# Allegro board belt-box-002-119pm14.brd
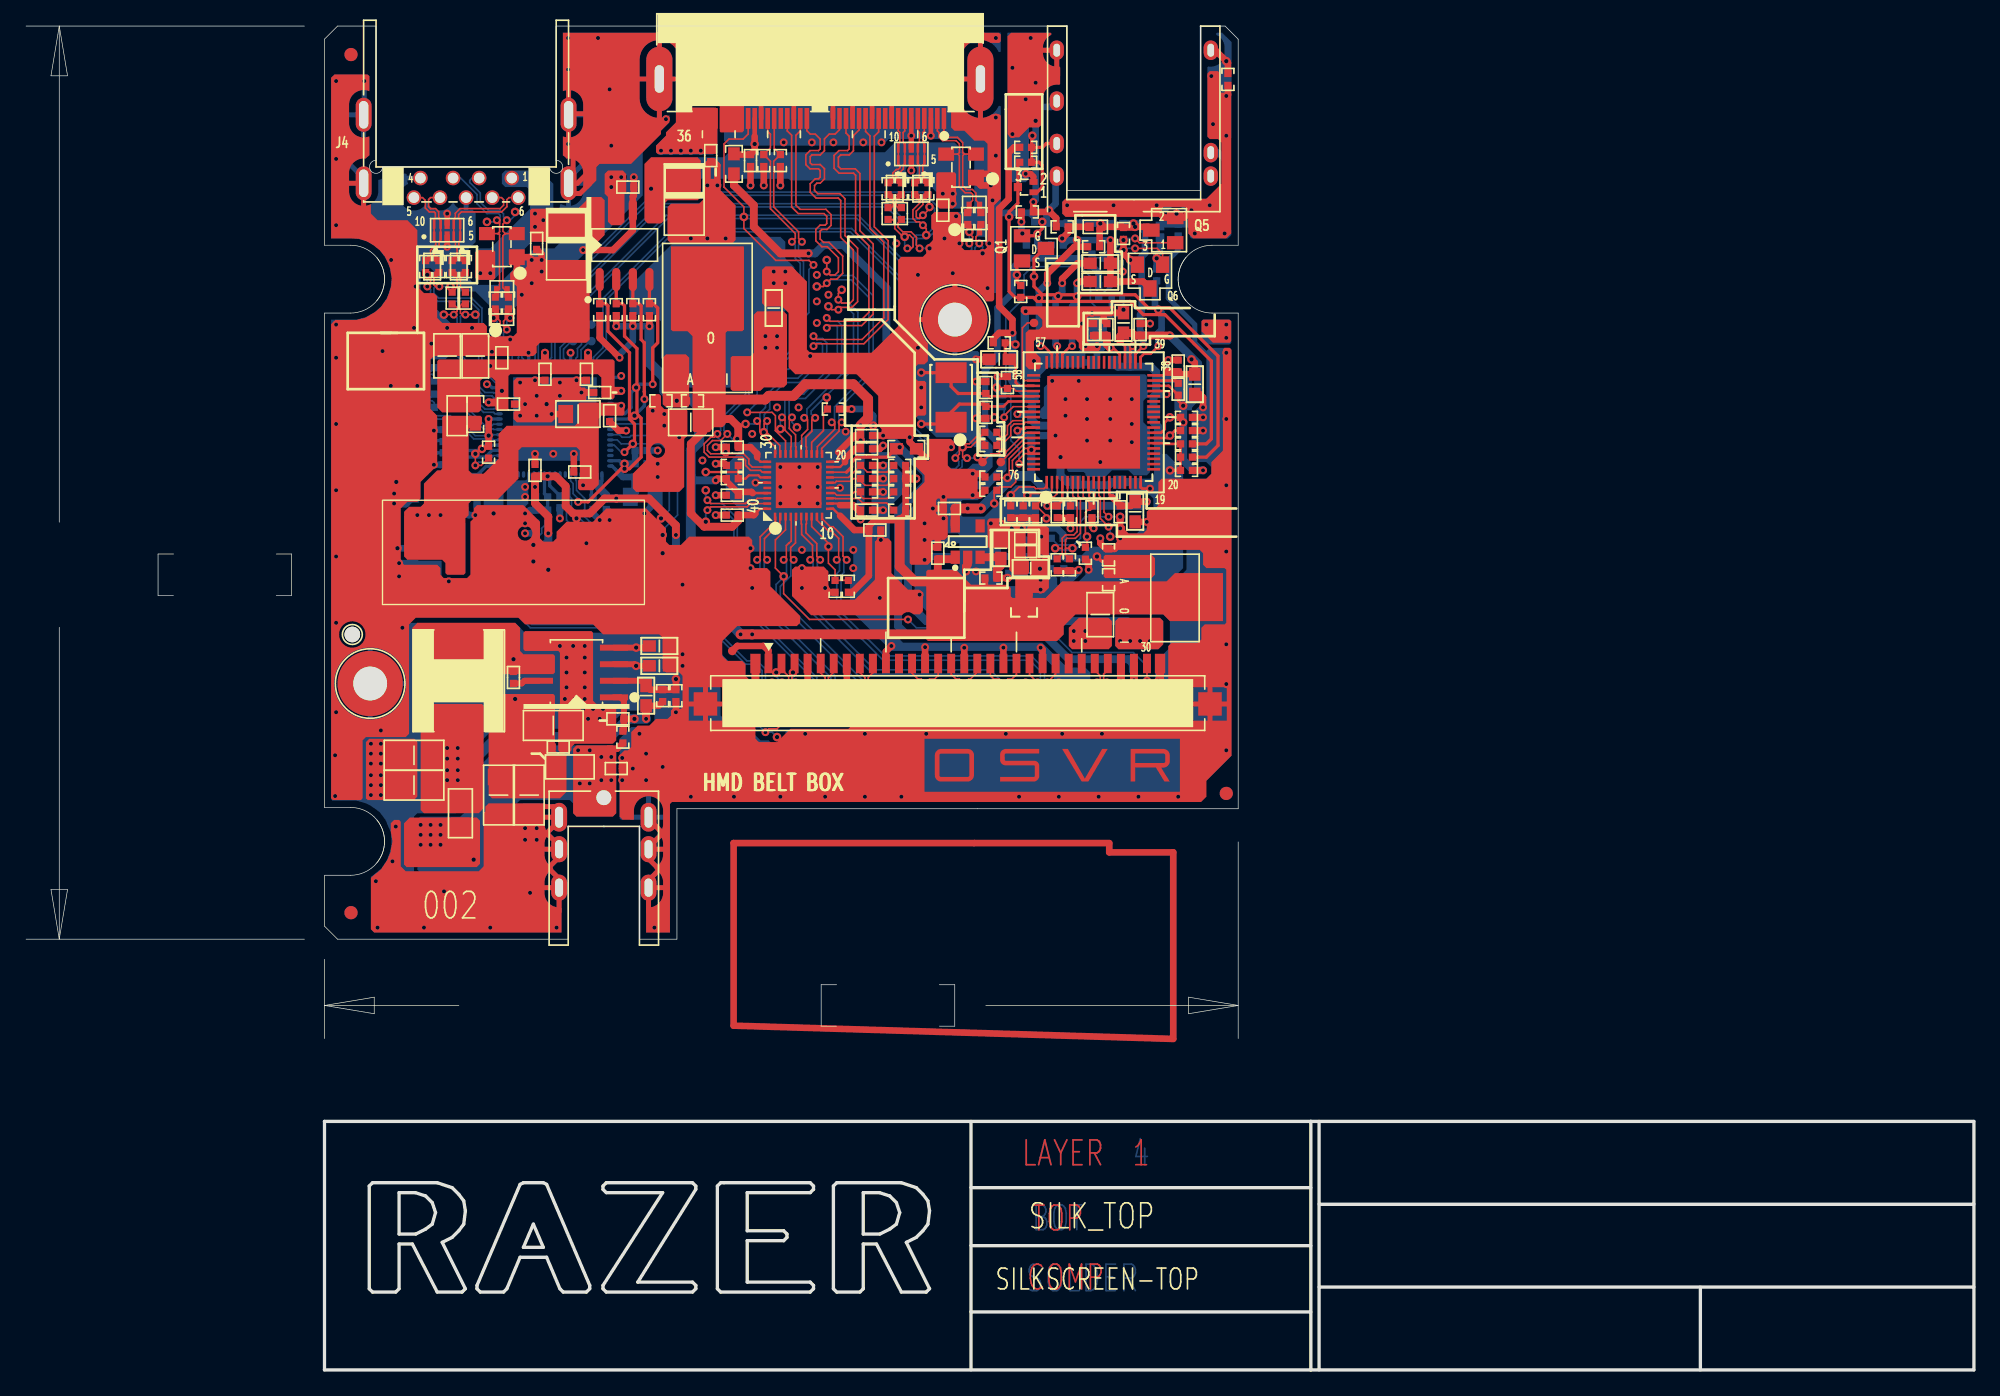
[diagram p0: board, top side]
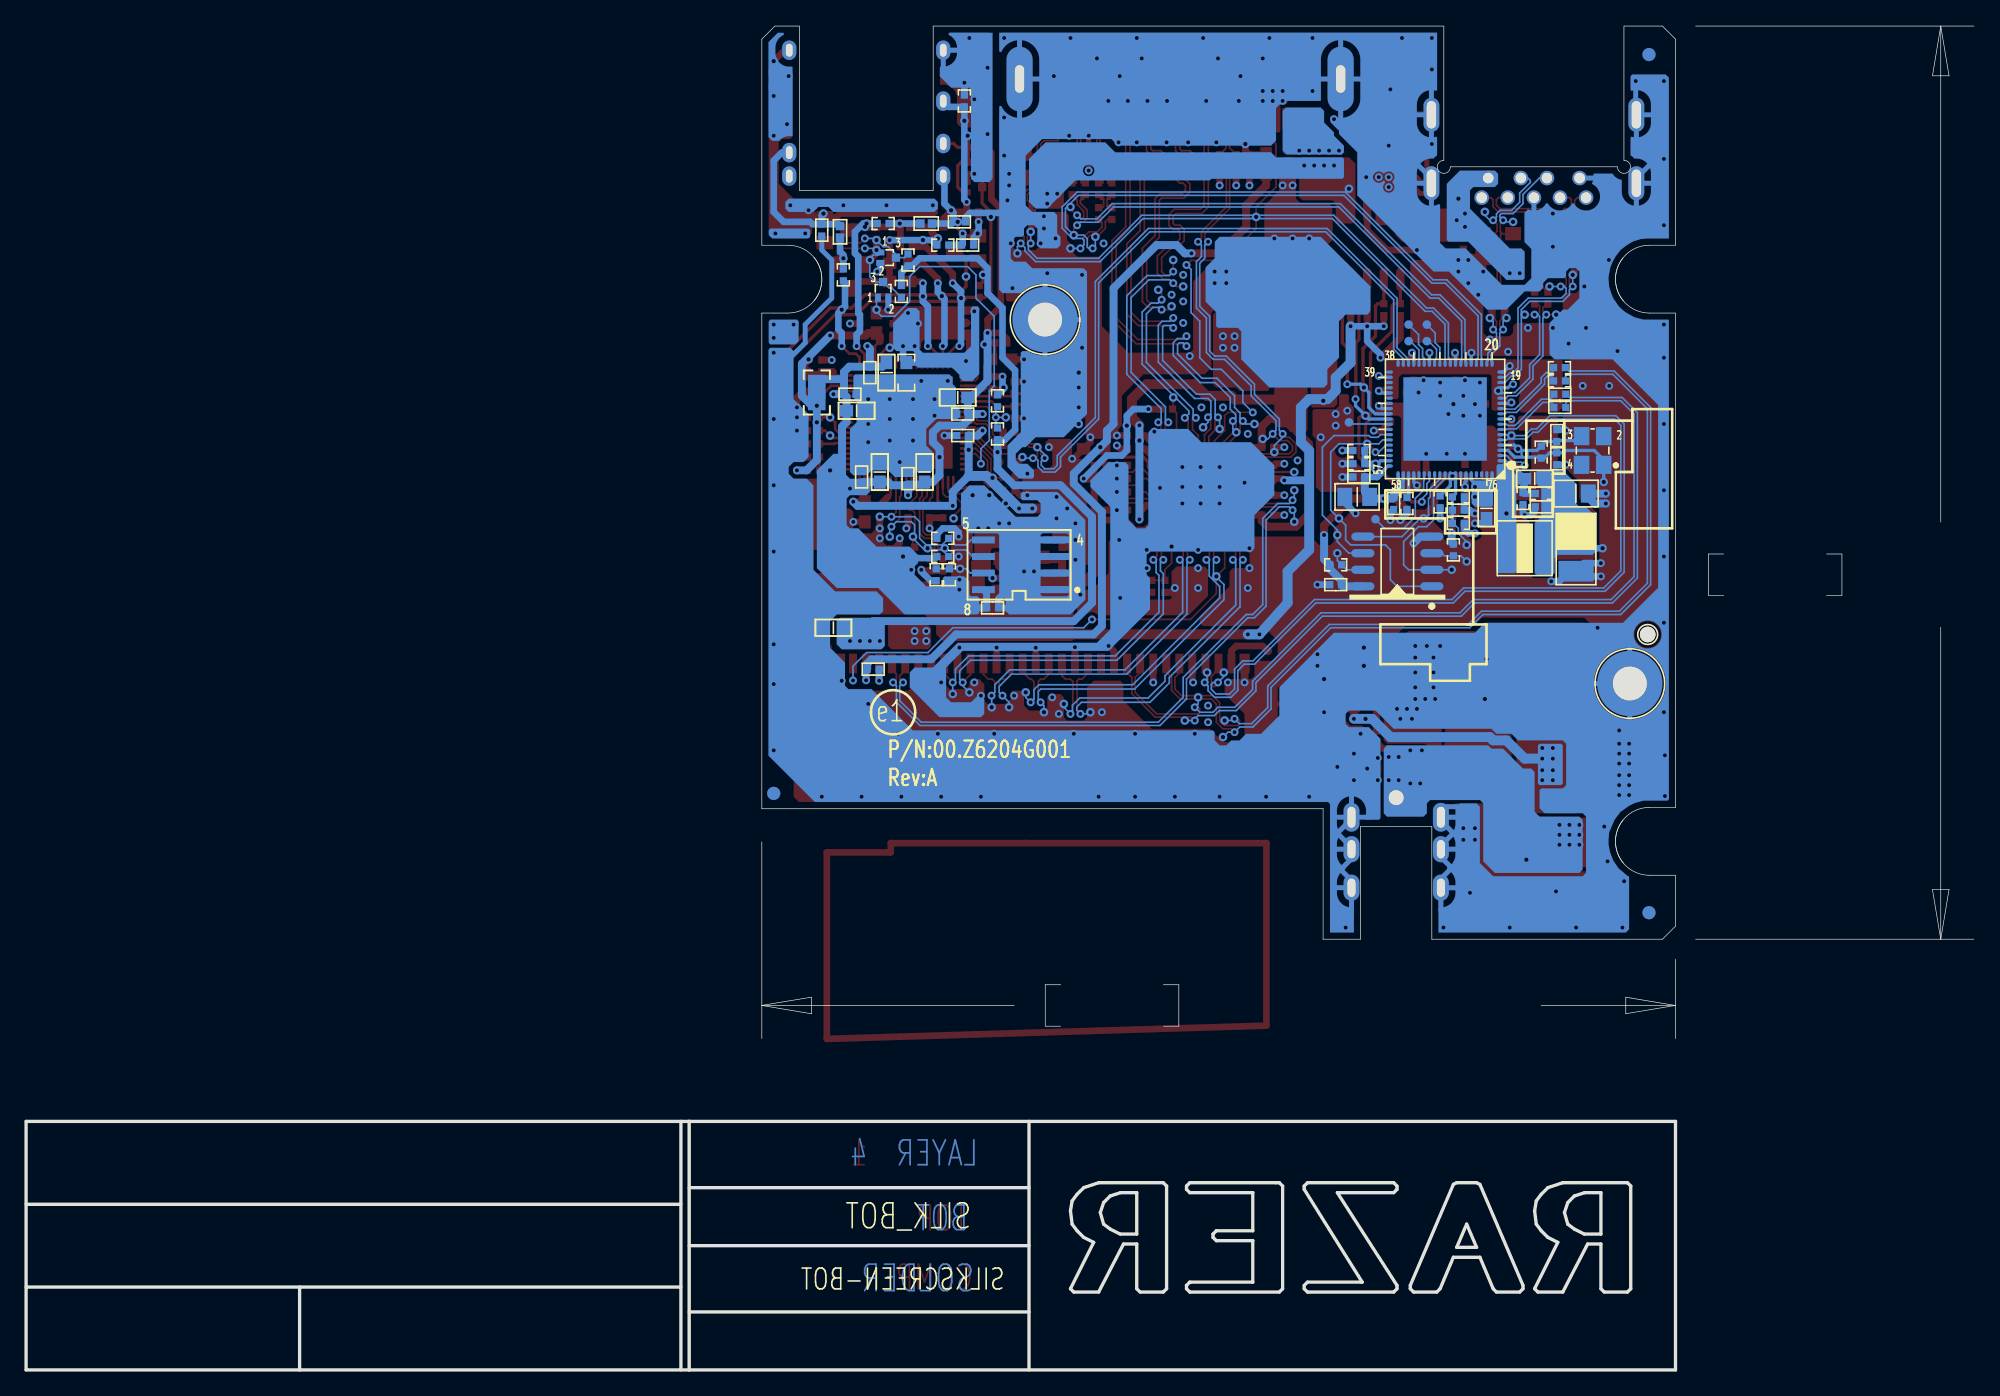
[diagram p1: board, bottom side, seen from below]

Outline 149.22 x 103.02 mm; copper layers: TOP, IN1, IN2, BOTTOM. Coordinates in mm from the lower left corner of the outline.
Outline path: 26.86,85.28 arc(27.46,83.62) 26.86,81.96 ; 26.86,42.18 arc(27.46,40.52) 26.86,38.86 ; 88.86,81.96 arc(88.26,83.62) 88.86,85.28 ; 22.86,102.02 22.86,86.22 24.86,86.22 arc(27.46,83.62) 24.86,81.02 22.86,81.02 22.86,43.12 24.86,43.12 arc(27.46,40.52) 24.86,37.92 22.86,37.92 22.86,34.02 23.86,33.02 41.53,33.02 41.53,41.67 46.99,41.67 46.99,33.02 49.86,33.02 49.86,43.02 92.86,43.02 92.86,81.02 90.86,81.02 arc(88.26,83.62) 90.86,86.22 92.86,86.22 92.86,102.02 91.86,103.02 89.99,103.02 89.99,90.42 79.73,90.42 79.73,103.02 40.61,103.02 40.61,92.73 arc(40.96,91.88) 40.11,92.23 27.31,92.23 arc(26.46,91.88) 26.81,92.73 26.81,103.02 23.86,103.02 22.86,102.02

## Design rules (mm)
net group DIFFPAIR0: nets HMD_CON_DATA2+ HMD_CON_DATA2-
net group DIFFPAIR1: nets HMD_CON_DATA1+ HMD_CON_DATA1-
net group DIFFPAIR2: nets HMD_CON_DATA0+ HMD_CON_DATA0-
net group DIFFPAIR3: nets HMD_CON_CLK+ HMD_CON_CLK-
net group DIFFPAIR4: nets HDMI_CON_CLK+ HDMI_CON_CLK-
net group DIFFPAIR5: nets HDMI_CON_DATA0+ HDMI_CON_DATA0-
net group DIFFPAIR6: nets HDMI_CON_DATA1+ HDMI_CON_DATA1-
net group DIFFPAIR7: nets HDMI_CON_DATA2+ HDMI_CON_DATA2-
net group DIFFPAIR13: nets HUB_RX1_CON_N HUB_RX1_CON_P
net group DIFFPAIR14: nets HUB_RXN1 HUB_RXP1
net group DIFFPAIR15: nets HUB_TX1_CON_N HUB_TX1_CON_P
net group DIFFPAIR16: nets USB3_TX1_C_N USB3_TX1_C_P
net group DIFFPAIR17: nets HUB_TXN1 HUB_TXP1
net group DIFFPAIR18: nets USB1+ USB1-
net group DIFFPAIR19: nets HUB_D+1 HUB_D-1
net group DIFFPAIR20: nets USB3.0_RXN_R USB3.0_RXP_R
net group DIFFPAIR21: nets USB3.0_TXN_R USB3.0_TXP_R
net group DIFFPAIR22: nets USB3.0_RXN USB3.0_RXP
net group DIFFPAIR23: nets USB3.0_TXN USB3.0_TXP
net group DIFFPAIR24: nets USB2.0_D+ USB2.0_D-
net group DIFFPAIR25: nets HUB_TX2_CON_N HUB_TX2_CON_P
net group DIFFPAIR26: nets USB3_TX2_C_N USB3_TX2_C_P
net group DIFFPAIR27: nets HUB_TXN2 HUB_TXP2
net group DIFFPAIR28: nets HUB_RX2_CON_N HUB_RX2_CON_P
net group DIFFPAIR29: nets HUB_RXN2 HUB_RXP2
net group DIFFPAIR30: nets USB2+ USB2-
net group DIFFPAIR31: nets HUB_D+2 HUB_D-2
net group DIFFPAIR32: nets USBP1N_R USBP1P_R
net group DIFFPAIR33: nets HUB_D+3 HUB_D-3

## Placement (name value [footprint] x y rotation side)
C1  0.1UF  [C0402]  54.1 65.53 0 top
C2  0.1U/16V_4  [C0402]  54.1 67.06 0 top
C3  0.1UF  [C0402]  54.1 70.74 0 top
C4  0.1UF  [C0402]  84.33 53.72 180 bottom
C5  0.1UF  [C0402]  55.5 92.71 270 top
C6  0.1UF  [C0402]  64.39 71.63 0 top
C7  0.1U/16V_4  [C0402]  65.02 64.39 0 top
C8  0.1UF  [C0402]  64.39 70.61 0 top
C9  0.1UF  [C0402]  64.39 65.91 0 top
C10  10uF_X5R_6.3V  [C0805]  82.3 57.91 90 top
C11  1uF_X5R_6.3V  [C0603]  87.38 56.9 180 bottom
C12  10uF_X5R_6.3V  [C0805]  50.93 72.64 0 top
C13  1uF_X5R_6.3V  [C0603]  57.28 81.41 270 top
C14  6TPE220MAZB  [TANB]  50.42 89.53 270 top
C15  470pF_X7R_50V  [C0402]  70.23 88.9 270 top
C16  0.1uF_X5R_10V  [C0402]  67.06 88.65 90 top
C17  0.1uF_X5R_10V  [C0402]  66.04 88.65 90 top
C18  0.1uF_X5R_10V  [C0402]  31.72 74.8 180 bottom
C19  0.1uF_X5R_10V  [C0402]  31.72 73.79 180 bottom
C20  0.1UF  [C0402]  42.42 68.83 180 top
C21  0.1UF  [C0402]  44.7 73.15 270 top
C22  0.1UF  [C0402]  43.94 74.93 180 top
C23  0.1UF  [C0402]  36.96 74.04 0 top
C24  0.1UF  [C0402]  42.93 76.33 270 top
C25  0.1UF  [C0402]  39.75 76.33 270 top
C26  0.1UF  [C0402]  36.45 77.6 90 top
C27  4.7UF  [C0603]  37.34 66.04 270 bottom
C28  10uF_X5R_6.3V  [C0805]  47.24 66.93 180 bottom
C29  0.1UF  [C0402]  38.99 68.96 90 top
C30  0.1UF  [C0402]  44.45 66.42 270 bottom
C31  0.1UF  [C0402]  47.12 68.45 0 bottom
C32  0.1UF  [C0402]  48.89 60.2 0 bottom
C33  22uF  [C0805]  30.49 67.18 0 bottom
C34  0.1UF  [C0402]  33.15 66.17 0 bottom
C35  22P_NPO_50V  [C0603]  33.64 68.33 0 bottom
C36  10uF_X5R_6.3V  [C0805]  42.29 73.28 0 top
C37  10uF_X5R_6.3V  [C0805]  34.42 77.72 270 top
C38  10uF_X5R_6.3V  [C0805]  32.26 77.72 270 top
C39  27P_NPO_50V  [C0402]  31.95 69.85 270 bottom
C40  1U/6.3V_4  [C0402]  39.5 65.91 180 bottom
C41  27P_NPO_50V  [C0402]  31.95 71.63 90 bottom
C42  1U/6.3V_4  [C0402]  46.1 90.68 0 top
C43  6TPE220MAZB  [TANB]  41.4 86.11 270 top
C44  470pF_X7R_50V  [C0402]  39.12 86.36 270 top
C45  0.1uF_X5R_10V  [C0402]  32.64 82.17 90 top
C46  0.1uF_X5R_10V  [C0402]  33.66 82.17 90 top
C47  15P/50V_4  [C0402]  73.53 75.31 90 top
C48  10U/6.3V_6  [C0603]  77.85 74.55 0 bottom
C49  0.1U/16V_4  [C0402]  77.47 73.28 0 bottom
C50  10U/6.3V_6  [C0603]  74.55 77.47 180 top
C51  18P/50V_4  [C0402]  73.53 73.41 270 top
C52  10U/6.3V_6  [C0603]  76.96 61.47 180 top
C53  1U/6.3V_4  [C0402]  76.58 63.75 180 top
C54  0.1U/16V/X7R_4  [C0402]  76.58 62.74 180 top
C55  10U/6.3V_6  [C0603]  80.39 68.83 90 bottom
C56  0.1U/16V_4  [C0402]  81.66 68.33 90 bottom
C57  10U/6.3V_6  [C0603]  84.96 65.79 270 top
C58  0.1U/16V_4  [C0402]  83.82 65.79 270 top
C59  0.1U/16V_4  [C0402]  77.47 71.63 0 bottom
C60  0.1U/16V_4  [C0402]  78.99 65.79 270 top
C61  1U/6.3V_4  [C0402]  81.79 79.76 270 top
C62  0.1U/16V_4  [C0402]  82.8 79.76 90 top
C63  10U/6.3V_6  [C0603]  84.07 80.26 90 top
C64  0.1U/16V_4  [C0402]  85.34 79.76 90 top
C65  0.1U/16V_4  [C0402]  85.22 68.45 90 bottom
C66  10U/6.3V_6  [C0603]  83.31 76.45 270 bottom
C67  0.1U/16V_4  [C0402]  84.58 76.45 270 bottom
C68  *10U/6.3V_6_NC  [C0603]  83.82 68.83 90 bottom
C69  1U/6.3V_4  [C0402]  69.85 62.61 270 top
C70  1U/6.3V_4  [C0402]  70.74 66.04 0 top
C71  10U/6.3V_6  [C0603]  89.53 75.56 270 top
C72  0.1U/16V_4  [C0402]  88.27 76.96 90 top
C73  1U/6.3V_4  [C0402]  88.27 75.18 90 top
C74  2.2U/6.3V_6  [C0603]  74.68 62.99 270 top
C75  10U/6.3V_6  [C0603]  85.6 73.53 180 bottom
C76  0.1U/16V_4  [C0402]  86.11 74.8 180 bottom
C77  2.2U/6.3V_6  [C0603]  82.3 83.44 180 top
C78  2.2U/6.3V_6  [C0603]  82.3 84.84 180 top
C79  0.1U/16V_4  [C0402]  75.18 58.42 180 bottom
C80  100pF_NPO_50V  [C0402]  77.72 88.01 180 bottom
C81  100pF_NPO_50V  [C0402]  88.27 87.38 270 bottom
C82  1uF/25V  [C0603]  48.51 53.98 0 top
C83  3300PF/25V  [C0603]  48.51 55.5 0 top
C84  10uf/25v  [C1206]  40.39 49.4 0 top
C85  0.1uf/16v_NC  [C0402]  45.34 49.91 180 top
C86  0.1uF/25V  [C0402]  37.34 53.09 90 top
C87  22UF/10V  [C1206]  29.72 47.12 180 top
C88  2200pF/50V_X7R  [C0402]  40.77 47.75 0 top
C89  10uf/25v  [C1206]  36.2 44.07 270 top
C90  22UF/10V  [C1206]  29.72 44.83 180 top
C91  22PF/50V  [C0603]  47.5 51.69 90 top
C92  2200pF/50V_X7R  [C0402]  45.21 46.1 0 top
C93  0.1UF  [C0402]  52.45 93.09 270 top
C94  X_0.1U/16V_4  [C0402]  81.66 65.79 90 top
C95  1U/6.3V_4  [C0402]  77.09 86.23 0 bottom
C96  10uf/25v  [C1206]  38.54 44.07 270 top
EC1  100uF  [TANBB2]  30.48 62.74 270 bottom
FB1  BK1608HS601  [L0402]  81.91 87.63 180 top
FB2  BK1608HS601  [L0402]  86.87 87.25 90 bottom
FB3  BK1608HS601  [L0402]  80.26 87.88 180 bottom
H1  -  [HOLEC197D102]  71.16 80.52 0 top
H2  -  [HOLEC197D102]  26.36 52.62 0 top
H4  -  [HOLEC47D47N]  24.99 56.38 0 top
J1  IPEX_30PIN  [I-PEX_20389-030E]  71.37 51.05 0 top
J2  Hirose 36pin  [HRS_EDC3-124422]  60.81 101.84 180 top
J3  SINGATRON_2DC-5061-Q05F  [SINGATRON_2DC3064-010111F]  44.26 35.57 180 top
J4  CON SUNFUN_U3FA-RS01  [SINGATRON_2UB1585-000121F]  33.71 96.22 180 top
J6  2SJ2284-102592  [SINGATRON_2SJ2284-102592]  84.86 103.02 180 top
L1  X_80_100MHz  [DLP11T]  68.58 90.55 270 top
L2  X_80_100MHz  [DLP11T]  66.55 90.55 270 top
L3  X_90_100MHz  [BW_WCM2012F2S-900T04]  72.64 88.27 90 top
L4  10uH  [TY-TOP_MDJE4040T100MM]  34.42 62.99 180 bottom
L5  X_80_100MHz  [DLP11T]  31.12 84.58 270 top
L6  X_80_100MHz  [DLP11T]  33.15 84.58 270 top
L7  X_90_100MHz  [BW_WCM2012F2S-900T04]  36.45 81.79 90 top
L8  *0_0805short_NC  [SHORT0805]  76.45 59.44 270 top
L9  *0_0805short_NC  [SHORT0805]  88.65 74.93 90 bottom
L10  3.3UH_SMPI0603HW  [SMPI0603HW]  33.15 52.83 270 top
L11  HCB2012K_800T80_0805  [L0805]  41.66 46.23 0 top
L12  X_HCB2012K_800T80_0805_NC  [L0805]  33.27 42.67 270 top
NOREF  -  []  71.12 46.36 0 top
NOREF#2  -  []  12.86 201.3 0 top
NOREF#3  -  [unnamed#2]  91.95 44.2 0 top
NOREF#4  -  []  17.86 196.3 90 top
NOREF#5  -  []  23.86 33.02 90 top
NOREF#6  -  []  12.86 201.3 0 top
NOREF#7  -  []  12.86 18.96 90 top
NOREF#8  -  []  22.86 0 0 top
NOREF#9  -  [unnamed#2]  24.89 100.84 0 top
NOREF#10  -  []  22.86 34.02 0 top
NOREF#11  -  [unnamed#2]  24.89 35.05 0 top
NOREF#12  -  [unnamed#2]  91.95 44.2 180 bottom
NOREF#13  -  [unnamed#2]  24.89 100.84 180 bottom
NOREF#14  -  [unnamed#2]  24.89 35.05 180 bottom
Q1  BSS138  [SOT23-GDS]  77.22 85.98 270 top
Q2  2SK3541  [VMT3-132]  76.58 90.68 90 top
Q3  2SK3541  [VMT3-132]  83.57 82.8 180 bottom
Q4  2SK3541  [VMT3-132]  83.19 85.27 270 bottom
Q5  Si2312BDS  [SOT23-132]  87.12 87.38 90 top
Q6  BSS138  [SOT23-GDS]  86.11 83.82 180 top
R1  2.2K  [R0402]  57.78 92.71 90 top
R2  2.2K  [R0402]  56.52 92.71 90 top
R3  0  [R0603]  54.23 92.46 90 top
R4  4.99K  [R0603]  67.44 70.61 0 top
R5  750  [R0402]  51.05 74.3 180 top
R6  115  [R0402]  82.93 60.58 90 top
R7  0  [R0402]  69.09 90.55 90 top
R8  187  [R0402]  82.93 62.48 90 top
R9  147  [R0402]  48.64 74.3 180 top
R10  0  [R0402]  68.07 90.55 90 top
R11  0  [R0402]  67.06 90.55 90 top
R12  X_4.7K  [R0402]  66.93 69.34 180 top
R13  X_4.7K  [R0402]  61.85 73.66 180 top
R14  4.7K  [R0402]  66.93 65.91 180 top
R15  X_4.7K  [R0402]  66.93 68.33 180 top
R16  X_4.7K  [R0402]  62.99 60.07 90 top
R17  X_4.7K  [R0402]  54.1 68.33 0 top
R18  4.7K  [R0402]  66.93 67.31 180 top
R19  0  [R0402]  66.04 90.55 90 top
R20  0  [R0402]  73.15 88.27 270 top
R21  X_4.7K  [R0402]  64.39 69.34 0 top
R22  X_4.7K  [R0402]  64.39 68.33 0 top
R23  X_4.7K  [R0402]  61.98 60.07 270 top
R24  X_4.7K  [R0402]  54.1 69.34 180 top
R25  X_4.7K  [R0402]  64.39 67.31 0 top
R26  0  [R0402]  72.14 88.27 270 top
R27  0  [R0402]  31.75 76.84 0 bottom
R28  0  [R0402]  31.75 75.82 0 bottom
R29  10K  [R0402]  48.89 61.72 0 bottom
R30  10K  [R0402]  39.88 62.87 270 bottom
R31  240K 1%  [R0402]  33.15 67.18 0 bottom
R32  0  [R0603]  34.42 73.28 90 top
R33  10K  [R0402]  40.89 66.55 90 bottom
R34  240K  [R0402]  34.54 66.8 270 bottom
R35  30K  [R0402]  39.5 64.9 0 bottom
R36  5.1K  [R0402]  47.12 70.49 180 bottom
R37  100K  [R0402]  43.43 66.42 270 bottom
R38  680  [R0402]  35.43 70.36 90 top
R39  1M  [R0402]  33.15 70.36 90 bottom
R40  39K  [R0402]  39.5 66.93 180 bottom
R41  10K  [R0402]  47.12 69.47 0 bottom
R42  100K  [R0402]  47.75 81.28 90 top
R43  10K  [R0402]  46.48 81.28 90 top
R44  10K  [R0402]  45.21 81.28 90 top
R45  100K  [R0402]  43.94 81.28 90 top
R46  0  [R0402]  30.61 84.58 90 top
R47  0  [R0402]  31.62 84.58 90 top
R48  0  [R0402]  32.64 84.58 90 top
R49  0  [R0402]  36.96 81.79 270 top
R50  0  [R0402]  33.66 84.58 90 top
R51  0  [R0402]  35.94 81.79 270 top
R52  22_4  [R0402]  73.91 71.88 0 top
R53  22_4  [R0402]  73.91 70.87 0 top
R54  100K_4  [R0402]  74.55 78.74 180 top
R55  100K_4  [R0402]  75.18 75.69 90 top
R56  10K_4  [R0402]  73.91 68.45 180 top
R57  100K_4  [R0402]  73.91 67.44 180 top
R58  10K_4  [R0402]  77.34 65.79 270 top
R59  10K_4  [R0402]  76.39 65.79 270 top
R60  10K_4  [R0402]  75.44 65.79 270 top
R61  80.6K/F_4  [R0402]  74.8 71.75 270 bottom
R62  130K/F_4  [R0402]  74.8 74.3 270 bottom
R63  10K_4  [R0402]  81.15 62.61 270 top
R64  4.7K_4  [R0402]  73.91 60.71 180 top
R65  10K_4  [R0402]  79.93 61.72 90 top
R66  10K_4  [R0402]  78.99 61.72 90 top
R67  10K_4  [R0402]  80.01 65.79 90 top
R68  *0_6_NC  [R0603]  81.79 76.45 90 bottom
R69  5.1K/F_4  [R0402]  88.9 68.96 180 top
R70  10K/F_4  [R0402]  88.9 69.98 0 top
R71  5.1K/F_4  [R0402]  88.9 70.99 0 top
R72  10K_4  [R0402]  88.9 72.01 180 top
R73  10K_4  [R0402]  88.9 73.03 180 top
R74  2.2K  [R0402]  81.79 86.11 180 top
R75  0  [R0402]  79.38 87.63 180 top
R76  X_0  [R0402]  76.71 88.77 180 top
R77  100  [R0402]  84.07 87.12 270 top
R78  X_0  [R0402]  77.34 97.28 270 bottom
R79  0  [R0402]  92.08 98.93 270 top
R80  *10K_4_NC  [R0402]  78.49 60.96 270 bottom
R82  33K  [R0402]  78.99 86.23 180 bottom
R84  0  [R0402]  76.2 82.68 90 top
R85  5.1_1%  [R0402]  86.61 83.95 90 bottom
R86  5.1_1%  [R0402]  83.57 87.88 180 bottom
R87  124K_1%  [R0402]  48.77 51.69 90 top
R88  21.5K_1%  [R0402]  49.78 51.69 270 top
R89  10K_1%  [R0402]  45.72 48.51 90 top
R99  10K_4  [R0402]  79.5 60.96 90 bottom
R102  10K_4  [R0402]  76.58 93.73 180 top
R103  X_0  [R0402]  76.58 92.58 0 top
R104  47K_4  [R0402]  82.17 82.68 90 bottom
R105  47K_4  [R0402]  81.66 85.09 270 bottom
R282  4.7K  [R0402]  78.99 63.75 0 bottom
R283  4.7K  [R0402]  78.99 62.36 0 bottom
TP1  PAD  [TPC26T]  73.28 69.6 0 top
TP2  PAD  [TPC26T]  74.68 69.6 0 top
TP3  TESTPAD_C26  [TPC26T]  77.22 80.26 0 top
TP4  TESTPAD_C26  [TPC26T]  54.1 55.12 0 top
TP5  TESTPAD_C26  [TPC26T]  45.85 65.21 180 bottom
TP6  TESTPAD_C26  [TPC26T]  47.88 72.64 180 bottom
TP7  TESTPAD_C26  [TPC26T]  41.91 80.14 180 bottom
TP8  TESTPAD_C26  [TPC26T]  41.91 78.87 180 bottom
TP9  TESTPAD_C26  [TPC26T]  43.31 80.14 180 bottom
TP10  TESTPAD_C26  [TPC26T]  43.31 78.87 180 bottom
U1  PS8407ATQFN40GTR2-A1  [TQFN40P500X500-41N]  59.18 67.82 90 top
U2  G1117  [SOT223-123]  87.76 59.18 270 top
U3  G1117  [TO252-AOI]  52.2 83.19 0 top
U4  LXES2TBBB4  [LXES2TBBB4-028]  67.82 93.22 90 top
U5  PRTR5V0U2X  [SOT143B]  71.63 92.2 90 top
U6  A25L512  [SOP8]  44.17 61.98 90 bottom
U7  LGA76  [QFN76-0_4MM]  40.51 72.9 90 bottom
U8  AIC1519N-0  [SOP8]  45.85 86.23 0 top
U9  PRTR5V0U2X  [SOT143B]  36.45 86.11 90 top
U10  LXES2TBBB4  [LXES2TBBB4-028]  32.26 87.38 90 top
U11  CX20705-21Z  [QFN76-9X9-4-77P]  81.79 72.64 90 top
U12  G9090-180T11U  [SOT23-5]  72.14 63.5 0 top
U13  BR24T256FJ-WGE2  [SOIC8-6-1_27]  73.15 61.72 90 bottom
U14  TPS54327DDA  [R-PDSO-G8]  42.16 53.47 90 top
X_FB1  120ohm@100MHz  [L0603]  33.02 73.15 90 top
Y1  25MHz 20PF 3.2x2.5 +/-30PPM  [SK-3M]  29.21 70.49 90 bottom
Y2  48M-30ppm-7A48000047  [XTL-5X3_2-3_8-2P]  70.87 74.55 90 top

## Library data of the parts
C1-C9 C15-C26 C29-C32 C34 C39-C42 C44-C47 C49 C51 C53 C54 C56 C58-C62 C64 C65 C67 C69 C70 C72 C73 C76 C79-C81 C85 C86 C88 C92-C95 = C0402
C10 C12 C28 C33 C36-C38 = C0805
C11 C13 C27 C35 C48 C50 C52 C55 C57 C63 C66 C68 C71 C74 C75 C77 C78 C82 C83 C91 = C0603
C14 C43 = TANB
C84 C87 C89 C90 C96 = C1206
EC1 = TANBB2
FB1-FB3 = L0402
H1 H2 = HOLEC197D102
H4 = HOLEC47D47N
J1 = I-PEX_20389-030E
J2 = HRS_EDC3-124422
J3 = SINGATRON_2DC3064-010111F
J4 = SINGATRON_2UB1585-000121F
J6 = SINGATRON_2SJ2284-102592
L1 L2 L5 L6 = DLP11T
L3 L7 = BW_WCM2012F2S-900T04
L4 = TY-TOP_MDJE4040T100MM
L8 L9 = SHORT0805
L10 = SMPI0603HW
L11 L12 = L0805
Q1 Q6 = SOT23-GDS
Q2-Q4 = VMT3-132
Q5 = SOT23-132
R1 R2 R5-R31 R33-R67 R69-R80 R82 R84-R89 R99 R102-R105 R282 R283 = R0402
R3 R4 R32 R68 = R0603
TP1-TP10 = TPC26T
U1 = TQFN40P500X500-41N
U2 = SOT223-123
U3 = TO252-AOI
U4 U10 = LXES2TBBB4-028
U5 U9 = SOT143B
U6 U8 = SOP8
U7 = QFN76-0_4MM
U11 = QFN76-9X9-4-77P
U12 = SOT23-5
U13 = SOIC8-6-1_27
U14 = R-PDSO-G8
X_FB1 = L0603
Y1 = SK-3M
Y2 = XTL-5X3_2-3_8-2P

## Footprints (pads in the part's own frame, mm; a bottom-side part is the same pattern mirrored in y, then rotated)
BW_WCM2012F2S-900T04
  rect 0.889x0.406 smd: 1(-0.85,0.4) 2(0.85,0.4) 3(-0.85,-0.4) 4(0.85,-0.4)
C0402
  rect 0.559x0.559 smd: 1(-0.457,0) 2(0.457,0)
C0603
  rect 1.016x0.889 smd: 1(-0.775,0) 2(0.775,0)
C0805
  rect 1.143x1.397 smd: 1(-0.953,0) 2(0.953,0)
C1206
  rect 1.27x1.651 smd: 1(-1.397,0) 2(1.397,0)
DLP11T
  rect 0.508x0.305 smd: 1(-0.625,0.275) 2(0.625,0.275) 3(0.625,-0.275) 4(-0.625,-0.275)
HOLEC47D47N
  round 1.194 hole 1.194 unplated: (0,0)
HOLEC197D102
  round 5.004 hole 2.591: 1(0,0)
HRS_EDC3-124422
  rect 0.356x1.6 smd: 1(-9.5,5.9) 2(-9,5.9) 3(-8.5,5.9) 4(-8,5.9) 5(-7.5,5.9) 6(-7,5.9) 7(-6.5,5.9) 8(-6,5.9) 9(-5.5,5.9) 10(-5,5.9) 11(-4.5,5.9) 12(-4,5.9) 13(-3.5,5.9) 14(-3,5.9) 15(-2.5,5.9) 16(-2,5.9) 17(-1.5,5.9) 18(-1,5.9) 19(1,5.9) 20(1.5,5.9) 21(2,5.9) 22(2.5,5.9) 23(3,5.9) 24(3.5,5.9) 25(4,5.9) 26(4.5,5.9) 27(5,5.9) 28(5.5,5.9) 29(6,5.9) 30(6.5,5.9) 31(7,5.9) 32(7.5,5.9) 33(8,5.9) 34(8.5,5.9) 35(9,5.9) 36(9.5,5.9)
  oval 2.007x4.953 hole 0.711x2.108: G1(-12.3,2.875) G2(12.3,2.875)
  rect 2.438x1.803 smd: S1(-4.625,1.3) S2(4.625,1.3)
I-PEX_20389-030E
  rect 0.61x1.499 smd: 1(-14.5,3.1) 2(-13.5,3.1) 3(-12.5,3.1) 4(-11.5,3.1) 5(-10.5,3.1) 6(-9.5,3.1) 7(-8.5,3.1) 8(-7.5,3.1) 9(-6.5,3.1) 10(-5.5,3.1) 11(-4.5,3.1) 12(-3.5,3.1) 13(-2.5,3.1) 14(-1.5,3.1) 15(-0.5,3.1) 16(0.5,3.1) 17(1.5,3.1) 18(2.5,3.1) 19(3.5,3.1) 20(4.5,3.1) 21(5.5,3.1) 22(6.5,3.1) 23(7.5,3.1) 24(8.5,3.1) 25(9.5,3.1) 26(10.5,3.1) 27(11.5,3.1) 28(12.5,3.1) 29(13.5,3.1) 30(14.5,3.1)
  rect 1.803x1.803 smd: G1(-19.325,0) G2(19.325,0)
  rect 0.787x1.499 smd: S1(-15.5,3.1) S2(15.5,3.1)
L0402
  rect 0.66x0.66 smd: 1(-0.446,0) 2(0.446,0)
L0603
  rect 1.016x1.016 smd: 1(-0.813,0) 2(0.813,0)
L0805
  rect 1.346x1.448 smd: 1(-1.003,0) 2(1.003,0)
LXES2TBBB4-028
  rect 0.686x0.203 smd: 1(-0.437,1) 2(-0.437,0.5) 4(-0.437,-0.5) 5(-0.437,-1) 6(0.437,-1) 7(0.437,-0.5) 9(0.437,0.5) 10(0.437,1)
  rect 0.686x0.406 smd: 3(-0.437,0) 8(0.437,0)
QFN76-0_4MM
  oval 0.254x0.508 smd: 1(-3.6,-4.25) 2(-3.2,-4.25) 3(-2.8,-4.25) 4(-2.4,-4.25) 5(-2,-4.25) 6(-1.6,-4.25) 7(-1.2,-4.25) 8(-0.8,-4.25) 9(-0.4,-4.25) 10(0,-4.25) 11(0.4,-4.25) 12(0.8,-4.25) 13(1.2,-4.25) 14(1.6,-4.25) 15(2,-4.25) 16(2.4,-4.25) 17(2.8,-4.25) 18(3.2,-4.25) 19(3.6,-4.25) 39(3.6,4.25) 40(3.2,4.25) 41(2.8,4.25) 42(2.4,4.25) 43(2,4.25) 44(1.6,4.25) 45(1.2,4.25) 46(0.8,4.25) 47(0.4,4.25) 48(0,4.25) 49(-0.4,4.25) 50(-0.8,4.25) 51(-1.2,4.25) 52(-1.6,4.25) 53(-2,4.25) 54(-2.4,4.25) 55(-2.8,4.25) 56(-3.2,4.25) 57(-3.6,4.25)
  oval 0.508x0.254 smd: 20(4.25,-3.6) 21(4.25,-3.2) 22(4.25,-2.8) 23(4.25,-2.4) 24(4.25,-2) 25(4.25,-1.6) 26(4.25,-1.2) 27(4.25,-0.8) 28(4.25,-0.4) 29(4.25,0) 30(4.25,0.4) 31(4.25,0.8) 32(4.25,1.2) 33(4.25,1.6) 34(4.25,2) 35(4.25,2.4) 36(4.25,2.8) 37(4.25,3.2) 38(4.25,3.6) 58(-4.25,3.6) 59(-4.25,3.2) 60(-4.25,2.8) 61(-4.25,2.4) 62(-4.25,2) 63(-4.25,1.6) 64(-4.25,1.2) 65(-4.25,0.8) 66(-4.25,0.4) 67(-4.25,0) 68(-4.25,-0.4) 69(-4.25,-0.8) 70(-4.25,-1.2) 71(-4.25,-1.6) 72(-4.25,-2) 73(-4.25,-2.4) 74(-4.25,-2.8) 75(-4.25,-3.2) 76(-4.25,-3.6)
  rect 6.401x6.401 smd: 77(0,0)
QFN76-9X9-4-77P
  rect 0.991x0.203 smd: 1(-4.6,3.6) 2(-4.6,3.2) 3(-4.6,2.8) 4(-4.6,2.4) 5(-4.6,2) 6(-4.6,1.6) 7(-4.6,1.2) 8(-4.6,0.8) 9(-4.6,0.4) 10(-4.6,0) 11(-4.6,-0.4) 12(-4.6,-0.8) 13(-4.6,-1.2) 14(-4.6,-1.6) 15(-4.6,-2) 16(-4.6,-2.4) 17(-4.6,-2.8) 18(-4.6,-3.2) 19(-4.6,-3.6) 39(4.6,-3.6) 40(4.6,-3.2) 41(4.6,-2.8) 42(4.6,-2.4) 43(4.6,-2) 44(4.6,-1.6) 45(4.6,-1.2) 46(4.6,-0.8) 47(4.6,-0.4) 48(4.6,0) 49(4.6,0.4) 50(4.6,0.8) 51(4.6,1.2) 52(4.6,1.6) 53(4.6,2) 54(4.6,2.4) 55(4.6,2.8) 56(4.6,3.2) 57(4.6,3.6)
  rect 0.203x0.991 smd: 20(-3.6,-4.6) 21(-3.2,-4.6) 22(-2.8,-4.6) 23(-2.4,-4.6) 24(-2,-4.6) 25(-1.6,-4.6) 26(-1.2,-4.6) 27(-0.8,-4.6) 28(-0.4,-4.6) 29(0,-4.6) 30(0.4,-4.6) 31(0.8,-4.6) 32(1.2,-4.6) 33(1.6,-4.6) 34(2,-4.6) 35(2.4,-4.6) 36(2.8,-4.6) 37(3.2,-4.6) 38(3.6,-4.6) 58(3.6,4.6) 59(3.2,4.6) 60(2.8,4.6) 61(2.4,4.6) 62(2,4.6) 63(1.6,4.6) 64(1.2,4.6) 65(0.8,4.6) 66(0.4,4.6) 67(0,4.6) 68(-0.4,4.6) 69(-0.8,4.6) 70(-1.2,4.6) 71(-1.6,4.6) 72(-2,4.6) 73(-2.4,4.6) 74(-2.8,4.6) 75(-3.2,4.6) 76(-3.6,4.6)
  rect 7.112x7.112 smd: 77(0,0)
R0402
  rect 0.559x0.559 smd: 1(-0.457,0) 2(0.457,0)
R0603
  rect 1.016x0.889 smd: 1(-0.775,0) 2(0.775,0)
R-PDSO-G8
  rect 0.457x2.159 smd: 1(-1.905,-2.875) 2(-0.635,-2.875) 3(0.635,-2.875) 4(1.905,-2.875) 5(1.905,2.875) 6(0.635,2.875) 7(-0.635,2.875) 8(-1.905,2.875)
  rect 3.099x2.413 smd: 9(0,0)
SHORT0805
  rect 1.422x1.346 smd: 1(0.895,0) 2(-0.895,0)
SINGATRON_2DC3064-010111F
  rect 1.524x1.524 hole 1.143: 1(0,-8.3)
  oval 1.219x2.21 hole 0.61x1.6: 2(3.425,-6.8) G1(-3.425,-6.8)
  oval 1.219x2.007 hole 0.61x1.397: 3(3.425,-4.35) 4(-3.425,-4.35) G2(-3.425,-1.4) G3(3.425,-1.4)
SINGATRON_2SJ2284-102592
  oval 1.092x1.499 hole 0.508x0.991: 1(-5.9,9.7) 2(5.9,11.5) 3(-5.9,1.85) 4(5.9,5.75) 5(-5.9,11.5) 6(5.9,1.85) 7(5.9,9)
SINGATRON_2UB1585-000121F
  round 1.118 hole 0.813: 1(-3.5,4.85) 2(-1,4.85) 3(1,4.85) 4(3.5,4.85) 5(4,6.35) 6(2,6.35) 7(0,6.35) 8(-2,6.35) 9(-4,6.35)
  oval 1.219x2.616 hole 0.711x2.108: G1(-7.85,5.25) G2(7.85,5.25) G3(-7.85,0) G4(7.85,0)
SK-3M
  rect 1.397x1.194 smd: 1(-1.1,-0.85) 2(1.1,-0.85) 3(1.1,0.85) 4(-1.1,0.85)
SMPI0603HW
  rect 2.489x3.505 smd: 1(-3.1,0) 2(3.1,0)
SOIC8-6-1_27
  rect 0.533x1.753 smd: 1(-1.905,-2.73) 2(-0.635,-2.73) 3(0.635,-2.73) 4(1.905,-2.73) 5(1.905,2.73) 6(0.635,2.73) 7(-0.635,2.73) 8(-1.905,2.73)
SOP8
  oval 0.635x1.778 smd: 1(-1.905,-2.642) 2(-0.635,-2.642) 3(0.635,-2.642) 4(1.905,-2.642) 5(1.905,2.642) 6(0.635,2.642) 7(-0.635,2.642) 8(-1.905,2.642)
SOT23-5
  rect 0.711x1.016 smd: 1(-0.95,-1.2) 2(0,-1.2) 3(0.95,-1.2) 4(0.95,1.2) 5(-0.95,1.2)
SOT23-132
  rect 1.016x1.27 smd: 1(-0.965,-0.914) 2(0.965,-0.914) 3(0,0.914)
SOT23-GDS
  rect 1.016x1.27 smd: D(0,0.914) G(-0.965,-0.914) S(0.965,-0.914)
SOT143B
  rect 1.219x1.219 smd: 1(-0.8,-1.143)
  rect 1.016x1.219 smd: 2(1.003,-1.143) 3(1.003,1.143) 4(-1.003,1.143)
SOT223-123
  rect 0.991x2.311 smd: 1(-2.3,-2.75) 3(2.3,-2.75)
  custom 3.302x7.874 smd: 2(0,0)
TANB
  rect 1.27x2.54 smd: 1(-1.651,0) 2(1.651,0)
TANBB2
  rect 1.6x2.692 smd: 1(-1.5,0) 2(1.5,0)
TO252-AOI
  rect 0.711x2.311 smd: A(-2.29,-6.876) I(2.29,-6.876)
  rect 5.588x6.401 smd: O(0,-0.254)
TPC26T
  round 0.66 smd: 1(0,0)
TQFN40P500X500-41N
  rect 0.6x0.2 smd: 1(-2.4,1.8) 2(-2.4,1.4) 3(-2.4,1) 4(-2.4,0.6) 5(-2.4,0.2) 6(-2.4,-0.2) 7(-2.4,-0.6) 8(-2.4,-1) 9(-2.4,-1.4) 10(-2.4,-1.8) 21(2.4,-1.8) 22(2.4,-1.4) 23(2.4,-1) 24(2.4,-0.6) 25(2.4,-0.2) 26(2.4,0.2) 27(2.4,0.6) 28(2.4,1) 29(2.4,1.4) 30(2.4,1.8)
  rect 0.2x0.6 smd: 11(-1.8,-2.4) 12(-1.4,-2.4) 13(-1,-2.4) 14(-0.6,-2.4) 15(-0.2,-2.4) 16(0.2,-2.4) 17(0.6,-2.4) 18(1,-2.4) 19(1.4,-2.4) 20(1.8,-2.4) 31(1.8,2.4) 32(1.4,2.4) 33(1,2.4) 34(0.6,2.4) 35(0.2,2.4) 36(-0.2,2.4) 37(-0.6,2.4) 38(-1,2.4) 39(-1.4,2.4) 40(-1.8,2.4)
  rect 3.5x3.5 smd: E1(0,0)
TY-TOP_MDJE4040T100MM
  rect 1.194x3.708 smd: 1(-1.4,0) 2(1.4,0)
unnamed#2
  round 1.016 smd: 1(0,0)
VMT3-132
  rect 0.457x0.635 smd: 1(-0.4,-0.599) 2(0.4,-0.599)
  rect 0.635x0.635 smd: 3(-0.001,0.599)
XTL-5X3_2-3_8-2P
  rect 1.6x2.388 smd: 1(-1.9,0) 2(1.9,0)

## Nets
+3.3V_VDDO: C48.1 C49.1 C52.1 C53.1 C54.1 C55.1 C56.1 C65.1 C66.1 C67.1 C68.1 C75.1 C76.1 C79.1 L8.2 L9.1 R54.2 R58.2 R59.2 R60.2 R63.2 R80.2 R102.2 R282.2 R283.2 U11.9 U11.19 U11.35 U11.41 U11.65 U13.8
+5V: C11.2 C13.2 C27.1 C42.1 C87.1 C90.1 C91.1 L10.2 L12.1 R1.1 R2.1 R33.1 R35.1 R36.1 R61.2 R87.1 R104.2 R105.2 U2.3 U3.I U7.72 U7.76 U8.7
+AVDDH33: C63.1 C64.1 L9.2 R69.1 U11.42
+V1.5: C1.2 C3.2 C6.1 C8.1 C9.1 C12.2 R5.1 U1.12 U1.19 U1.20 U1.31 U1.40 U3.O
+V3.3: C2.2 C7.1 C10.2 C69.2 L8.1 R6.1 R12.1 R13.1 R14.1 R15.1 R16.1 R17.1 R18.1 R42.1 R43.1 R44.1 R45.1 R64.2 U1.11 U1.37 U2.2 U12.1
+V5_USB: J1.1 TP4.1
AGND: C61.1 C62.2 C63.2 C64.2 C95.1 J6.6 Q2.2 Q3.2 Q4.2 Q5.2 R68.2 R76.2 R78.1 R79.2
AV12: C22.1 C23.1 C24.1 C25.1 C26.1 C37.2 C38.2 R32.2 U7.13 U7.19 U7.27 U7.35 U7.43 X_FB1.2
DV12: C20.1 C21.1 C33.2 C34.1 C35.1 C36.2 EC1.1 L4.2 R31.1 R32.1 U7.46 U7.61 X_FB1.1
GND: C1.1 C2.1 C3.1 C4.2 C5.2 C6.2 C7.2 C8.2 C9.2 C10.1 C11.1 C12.1 C13.1 C14.2 C15.2 C20.2 C21.2 C22.2 C23.2 C24.2 C25.2 C26.2 C27.2 C28.1 C29.2 C30.2 C31.2 C32.2 C33.1 C34.2 C36.1 C37.1 C38.1 C39.2 C40.2 C41.2 C42.2 C43.2 C44.2 C47.2 C48.2 C49.2 C50.2 C51.2 C52.2 C53.2 C54.2 C55.2 C56.2 C57.2 C58.2 C59.2 C60.2 C65.2 C66.2 C67.2 C68.2 C69.1 C70.1 C71.2 C72.2 C74.1 C75.2 C76.2 C79.2 C80.2 C81.2 C82.2 C83.2 C84.2 C85.2 C87.2 C88.2 C89.2 C90.2 C92.2 C93.2 C94.1 C96.2 EC1.2 H1.1 H2.1 J1.4 J1.7 J1.10 J1.13 J1.16 J1.19 J1.22 J1.28 J1.G1 J1.G2 J1.S1 J1.S2 J2.3 J2.6 J2.9 J2.12 J2.15 J2.18 J2.21 J2.26 J2.29 J2.30 J2.31 J2.32 J2.G1 J2.G2 J2.S1 J2.S2 J3.2 J3.3 J3.4 J3.G1 J3.G2 J3.G3 J4.4 J4.7 J4.G1 J4.G2 J4.G3 J4.G4 R4.2 R8.2 R9.2 R21.2 R22.2 R23.2 R24.2 R25.2 R34.2 R37.2 R38.2 R40.2 R41.2 R55.2 R56.2 R57.2 R62.1 R65.1 R66.1 R67.1 R68.1 R72.1 R73.1 R88.2 R99.1 U1.15 U1.35 U1.E1 U4.3 U4.8 U5.1 U6.4 U7.10 U7.16 U7.24 U7.32 U7.40 U7.77 U8.6 U9.1 U10.3 U10.8 U11.77 U12.2 U13.1 U13.2 U13.3 U13.4 U14.5 U14.9
V33: C28.2 C29.1 C30.1 C31.1 C32.1 R29.2 R30.1 U6.8 U7.57 U7.58 U7.59 U7.71
VBUS-IN: R36.2 R41.1 U7.56
VIN: C92.1 C93.1 J2.33 J2.34 J2.35 J2.36 J3.1 L11.2 L12.2 R89.1
+1.8_VDD: C57.1 C58.1 C59.1 C60.1 C70.2 U11.4 U11.13 U11.68 U12.5
APP: Q3.3 Q4.1 Q6.G R104.1
APP#: Q4.3 Q5.1 R105.1
CFG: R13.2 U1.23
DCIN_EN: R14.2 U1.13
DDCBUF: R18.2 R25.1 U1.14
EQ: R12.2 R21.1 U1.17
FB: C35.2 R31.2 R34.1 U7.2
GPIO2: Q3.1 U11.73
HDMI_5V: C4.1 J1.29 R3.1
HDMI_CON_CLK+: J1.21 U1.9
HDMI_CON_CLK-: J1.23 U1.10
HDMI_CON_DATA0+: J1.18 U1.6
HDMI_CON_DATA0-: J1.20 U1.7
HDMI_CON_DATA1+: J1.15 U1.4
HDMI_CON_DATA1-: J1.17 U1.5
HDMI_CON_DATA2+: J1.12 U1.1
HDMI_CON_DATA2-: J1.14 U1.2
HDMI_CON_DET: J1.30 U1.3
HDMI_CON_SCL: J1.26 U1.38
HDMI_CON_SDA: J1.27 U1.39
HMD_5V: C5.1 J2.27 R3.2
HMD_CON_CLK+: J2.20 U1.22
HMD_CON_CLK-: J2.22 U1.21
HMD_CON_DATA0+: J2.17 U1.25
HMD_CON_DATA0-: J2.19 U1.24
HMD_CON_DATA1+: J2.14 U1.27
HMD_CON_DATA1-: J2.16 U1.26
HMD_CON_DATA2+: J2.11 U1.30
HMD_CON_DATA2-: J2.13 U1.29
HMD_CON_DET: J2.28 U1.28
HMD_CON_SCL: J2.24 R1.2 U1.32
HMD_CON_SDA: J2.25 R2.2 U1.33
HP_JD: J6.7 Q2.1 R102.1 R103.2
HP_JD#: Q2.3 R71.2 R84.1 R103.1
HP_OUT_L: R85.1 U11.39
HP_OUT_R: R86.1 U11.40
HPOUT-L_COMBO: C81.1 FB2.2 J6.1
HPOUT-L_R: FB2.1 R85.2
HPOUT-R_COMBO: C80.1 FB3.2 J6.2
HPOUT-R_R: FB3.1 R86.2
HUB_D+1: L7.1 R51.2 U7.20
HUB_D+2: L3.1 R26.2 U7.28
HUB_D+3: R52.1 U7.36
HUB_D-1: L7.3 R49.2 U7.21
HUB_D-2: L3.3 R20.2 U7.29
HUB_D-3: R53.1 U7.37
HUB_RX1_CON_N: J4.5 L5.4 R46.2 U10.1 U10.10
HUB_RX1_CON_P: J4.6 L5.1 R47.2 U10.2 U10.9
HUB_RX2_CON_N: J2.4 L1.1 R7.2 U4.5 U4.6
HUB_RX2_CON_P: J2.5 L1.4 R10.2 U4.4 U4.7
HUB_RXN1: L5.3 R46.1 U7.17
HUB_RXN2: L1.2 R7.1 U7.25
HUB_RXN3: TP9.1 U7.33
HUB_RXP1: L5.2 R47.1 U7.18
HUB_RXP2: L1.3 R10.1 U7.26
HUB_RXP3: TP10.1 U7.34
HUB_TX1_CON_N: J4.8 L6.4 R48.2 U10.4 U10.7
HUB_TX1_CON_P: J4.9 L6.1 R50.2 U10.5 U10.6
HUB_TX2_CON_N: J2.7 L2.1 R11.2 U4.2 U4.9
HUB_TX2_CON_P: J2.8 L2.4 R19.2 U4.1 U4.10
HUB_TXN1: C45.1 U7.14
HUB_TXN2: C16.1 U7.22
HUB_TXN3: TP7.1 U7.30
HUB_TXP1: C46.1 U7.15
HUB_TXP2: C17.1 U7.23
HUB_TXP3: TP8.1 U7.31
I2C_CLT_EN: R16.2 R23.1 U1.8
I2C_CSN: C94.2 R63.1 U11.8
I2C_EN: R67.2 U11.5
I2C_SCL: R66.2 U11.6
I2C_SDA: R65.2 U11.7
ISET: R17.2 R24.1 U1.34
MIC1_L: C77.2 U11.54
MIC1_MIX: C77.1 C78.1 Q6.D R82.1
MIC1_MIX_FB: FB1.2 R75.1
MIC1_MIX_R: FB1.1 Q5.3 R74.1 R77.1
MIC1_R: C78.2 U11.55
MIC1_VREFOUT_L: R74.2 U11.56
MIC1_VREFOUT_R: TP3.1 U11.59
MIC_JD#: Q1.D R70.2
MIC_MIX: J6.4 R75.2 R76.1 R78.2
NVMCLK: R283.1 U11.11 U13.6
NVMDAT: R282.1 U11.12 U13.5
OVCUR1#: R44.2 U7.64 U8.2
OVCUR2#: R43.2 U7.48 U8.3
P_SPI_CK: U6.6 U7.51
P_SPI_CZ: U6.1 U7.52
P_SPI_DI: U6.2 U7.67
P_SPI_DO: U6.5 U7.66
PGANG: R37.1 U7.60
PRE: R15.2 R22.1 U1.16
PSELF: R33.2 U7.68
PWREN1#: R45.2 U7.53 U8.1
PWREN2#: R42.2 U7.47 U8.4
PWREN3#: TP6.1 U7.49
RESET#: C40.1 R35.2 R40.1 U7.69
RST_N: C50.1 R54.1 U11.60
RTERM: R38.1 U7.3
SENSE_A: R69.2 R70.1 R71.1 U11.25
SW: L4.1 U7.1
USB1+: J4.3 L7.2 R51.1 U9.3
USB1-: J4.2 L7.4 R49.1 U9.2
USB2+: J2.2 L3.2 R26.1 U5.3
USB2-: J2.1 L3.4 R20.1 U5.2
USB2.0_D+: J1.3 U7.7
USB2.0_D-: J1.2 U7.6
USB3.0_RXN: J1.5 R28.1
USB3.0_RXN_R: R28.2 U7.11
USB3.0_RXP: J1.6 R27.1
USB3.0_RXP_R: R27.2 U7.12
USB3.0_TXN: C19.2 J1.8
USB3.0_TXN_R: C19.1 U7.8
USB3.0_TXP: C18.2 J1.9
USB3.0_TXP_R: C18.1 U7.9
USB3_TX1_C_N: C45.2 L6.3 R48.1
USB3_TX1_C_P: C46.2 L6.2 R50.1
USB3_TX2_C_N: C16.2 L2.2 R11.1
USB3_TX2_C_P: C17.2 L2.3 R19.1
USB_DET: R61.1 R62.2 U11.64
USB_PWR1: C43.1 C44.1 J4.1 U8.8 U9.4
USB_PWR2: C14.1 C15.1 U5.4 U8.5
USBP1N_R: R53.2 U11.67
USBP1P_R: R52.2 U11.66
VOLT_MON: R73.2 U11.27
VOLUME: R72.2 U11.26
WP: R80.1 R99.2 U13.7
X1: C39.1 R39.1 U7.4 Y1.1
X2: C41.1 R39.2 U7.5 Y1.3
XTALIN: C47.1 U11.62 Y2.2
XTALOUT: C51.1 U11.63 Y2.1
N16700423: R4.1 U1.18
N16708492: R6.2 R8.1 U2.1
N16709232: R5.2 R9.1 U3.A
N16752922: R29.1 U6.7
N16752926: R30.2 U6.3
N16752974: TP5.1 U7.63
N16792985: R59.1 U11.2
N16793019: C73.1 U11.36
N16793115: C73.2 U11.37
N16793150: TP1.1 U11.69
N16793205: C61.2 C62.1 U11.43
N16793213: TP2.1 U11.70
N16793232: R58.1 U11.3
N16793236: C71.1 C72.1 U11.38
N16793242: R56.1 U11.71
N16793251: R60.1 U11.1
N16793299: R57.1 U11.72
N16793611: R55.1 U11.61
N16793759: C74.2 R64.1 U12.3
N16805452: J6.3 R79.1
N16805614: C95.2 Q1.G R82.2
N16805639: Q1.S R84.2
N16817726: C83.1 U14.4
N16817730: C82.1 U14.3
N16817738: C86.1 U14.7
N16817757: C84.1 C88.1 C89.1 C96.1 L11.1 U14.8
N16817767: C91.2 R87.2 R88.1 U14.2
N16817796: C85.1 R89.2 U14.1
N16817821: C86.2 L10.1 U14.6
N16854855: Q6.S R77.2

Pads without a net: J1 11 24 25; J2 10 23; J6 5; NOREF#3 1; NOREF#9 1; NOREF#11 1; NOREF#12 1; NOREF#13 1; NOREF#14 1; U1 36; U7 38 39 41 42 44 45 50 54 55 62 65 70 73 74 75; U11 10 14 15 16 17 18 20 21 22 23 24 28 29 30 31 32 33 34 44 45 46 47 48 49 50 51 52 53 57 58 74 75 76; U12 4; Y1 2 4

## Via types
v1: diameter 0.66, hole 0.33, TOP to BOTTOM, 134 vias
v2: diameter 0.61, hole 0.305, TOP to BOTTOM, 561 vias

## Routing (per net, layer and track width the routed paths; a pad name or vN(x,y) marks a point on that pad's centre or on a via; arc(x,y) is an arc through that point)
+3.3V_VDDO: length 75.1
  TOP w0.203: U11.19 85.39,67.69 85.51,67.56 v2(86.11,67.56) ; U11.41 84.59,78.3 v2(84.77,78.49) ; v2(87.38,74.8) 87.13,75.04 U11.35 ; U11.9 81.39,67.33 v2(81.66,67.06) ; v2(75.95,73.28) 76.11,73.44 U11.65
  TOP w0.508: R102.2 75.69,93.73 75.27,93.31 75.27,89.75 74.55,89.03 74.55,81.53 75.56,80.52 v2(75.56,79.5) 74.55,79.5 74.09,79.04 R54.2 ; R60.2 R59.2 R58.2 77.34,64.64 77.47,64.52 ; R63.2 81.41,61.9 v2(81.41,61.34)
  BOTTOM w0.508: R282.2 79.45,64.06 78.99,64.52 78.1,64.52 77.77,64.19 v2(77.77,63.88) ; R283.2 79.58,62.23 81.79,62.23
  BOTTOM w0.533: 77.47,58.42 C79.1 75.64,59.58 U13.8
  BOTTOM w0.61: C76.1 86.37,74.61 C75.1 86.37,72.66 86.72,72.31 86.72,68.3 86.28,67.87 ; C76.1 86.56,75.95 ; C76.1 v2(87.38,74.8) ; C67.1 86.16,76.91 86.56,76.5 86.56,75.95 ; C67.1 83.63,76.91 C66.1 83.31,77.23 ; C67.1 84.58,78.3 v2(84.77,78.49) ; 86.56,75.95 88.51,75.95 L9.1 ; C49.1 77.08,73.34 C48.1 76.84,74.55 75.56,75.82 v2(75.56,79.5) ; C49.1 77.01,72.85 77.47,72.39 79.25,72.39 79.76,71.88 79.76,71.12 79.25,70.61 v1(79.25,69.98) 79.25,68.58 79.76,68.07 80.38,68.07 C55.1 80.58,67.87 C56.1 ; C49.1 v2(75.95,73.28) ; C56.1 81.71,67.82 82.93,67.82 83.17,68.06 C68.1 85.15,68.06 C65.1 ; C56.1 v2(81.66,67.06)
  vias: v2(77.77,62.36) v2(77.72,60.58) v2(77.72,59.82)
+5V: length 85
  TOP w0.508: R87.1 48.45,50.91 C91.1 ; R1.1 v2(57.78,90.81) ; R2.1 v2(56.52,90.81)
  TOP w0.61: C91.1 v2(47.5,49.91)
  BOTTOM w0.254: U7.72 38.51,68.23 38.19,67.91 38.19,67.82 37.85,67.82 ; 37.21,67.82 36.91,68.12 U7.76
  BOTTOM w0.508: R61.2 74.24,71.3 73.46,72.09 73.46,76.63 74.42,77.6 74.42,81.41 75.56,82.55 75.56,84.46 76.33,85.22 80.77,85.22 81.36,84.63 R105.2 82.17,84.12 R104.2 ; R35.1 39.04,64.44 38.73,64.14 v2(38.23,64.14) ; R33.1 v2(40.89,65.28) ; R36.1 v2(48.39,70.49)
  BOTTOM w0.61: R61.2 v1(74.8,70.36) 74.8,69.09 73.53,67.82 69.98,67.82 67.56,65.41 67.56,58.8 68.96,57.4 84.33,57.4 84.71,57.02
  BOTTOM w0.762: v2(47.5,49.91) 46.1,49.91 44.7,48.51 37.08,48.51 36.83,48.26 35.81,48.26 34.42,46.86 v2(33.07,46.86)
  vias: v2(32.26,47.68) v2(32.26,46.86) v2(32.26,45.97) v2(32.26,45.21) v2(33.07,47.68) v2(33.07,45.97) v2(33.07,45.21) v2(38.23,67.69) v2(38.23,66.93) v2(44.83,91.44) v2(44.83,90.68) v2(45.59,91.44) v2(56.64,79.25) v2(56.64,78.36) v2(57.53,79.25) v2(57.53,78.36) v2(83.82,55.88) v2(84.58,55.88) v2(85.34,55.88) v2(86.11,55.88)
+AVDDH33: length 20
  TOP w0.203: 83.82,78.87 84.19,78.5 U11.42
  TOP w0.508: R69.1 v2(90.17,68.96)
  TOP w0.61: 83.82,78.87 83.82,79.24 C63.1 84.72,79.49 84.91,79.3 C64.1 v2(87.63,79.3)
  BOTTOM w0.61: v2(90.17,68.96) 89.43,68.96 88.65,69.75 v1(88.65,72.64) L9.2 89.15,74.03 89.79,74.68 89.79,77.14 v2(87.63,79.3)
+V1.5: length 57.6
  TOP w0.178: U1.40 56.24,66.02 55.88,65.66 ; U1.12 62.23,66.42 62.36,66.29 ; 62.23,70.36 62.23,69.75 62.1,69.62 U1.20 ; 62.74,69.6 62.36,69.22 U1.19 ; 56.01,69.98 56.01,69.88 56.27,69.62 U1.31
  TOP w0.508: 55.88,65.66 55.75,65.53 C1.2 ; 62.74,69.6 62.74,69.85 63.5,70.61 C8.1 C6.1 ; C6.1 v2(63.93,72.42) ; C6.1 63.5,71.63 62.23,70.36 ; v2(63.93,65.2) C9.1 63.75,65.91 63.37,66.29 62.36,66.29 ; C3.2 55.5,70.74 56.01,70.23 56.01,69.98
  TOP w0.61: C12.2 51.88,71.95 50.93,70.99 50.93,65.66 51.94,64.64 54.1,64.64 54.56,65.1 C1.2 ; C3.2 54.56,72.31 53.97,72.9 52.96,72.9
  TOP w0.762: 51.94,75.69 51.94,72.9 51.69,72.64 ; 52.96,74.42 52.99,74.39 56.61,74.39 56.9,74.68 58.8,74.68 59.69,75.56 63.37,75.56 64.51,74.43 64.51,72.99 v2(63.93,72.42)
  BOTTOM w0.61: v2(63.93,72.42) v1(63.93,71.25) v2(63.93,65.2)
+V3.3: length 99.7
  TOP w0.178: U1.11 61.83,66.02 62.36,65.49
  TOP w0.198: 55.66,67.22 U1.37
  TOP w0.483: C2.2 54.56,67.23 53.64,68.15 R17.1
  TOP w0.508: C7.1 63.46,64.39 62.36,65.49 ; C7.1 64.57,64.69 65.02,65.15 66.93,65.15 67.39,65.61 R14.1 R18.1 R15.1 R12.1 ; C7.1 64.57,60.88 63.3,59.61 R16.1 ; R45.1 43.94,79.12 v2(45.47,77.6) ; R42.1 v2(47.75,80.01) ; R13.1 v2(63.25,73.66) ; 73.41,59.56 73.46,59.61 R64.2 ; R43.1 v2(46.48,80.01) ; 55.66,67.22 55.57,67.31 54.81,67.31 C2.2 ; R44.1 v2(45.21,80.01) ; v2(52.83,68.2) 52.96,68.33 R17.1
  TOP w0.61: 70.48,60.58 69.85,61.21 C69.2 71.04,62.15 U12.1 ; v2(68.2,68.33) R15.1
  TOP w0.762: 69.22,56.39 v2(55.63,56.39) v2(54.74,56.39) ; 66.93,65.15 66.93,61.59 68.07,60.45 69.47,60.45
  BOTTOM w0.508: v2(46.48,80.01) 46.48,78.87 45.47,77.85 v2(45.47,77.6) ; v2(46.48,80.01) v2(47.75,80.01) ; v2(46.48,80.01) v2(45.21,80.01) ; v2(63.25,73.66) 64.39,73.66 64.9,73.15 v1(64.9,72.39) 64.9,70.49 65.28,70.1 66.42,70.1 v2(68.2,68.33)
  BOTTOM w0.61: 50.93,68.45 51.18,68.2 v2(52.83,68.2)
  BOTTOM w0.762: v2(47.75,80.01) 47.75,77.22 48.89,76.07 48.89,75.06 49.53,74.42 50.93,74.42 51.56,73.79 51.56,71.12 50.93,70.49 50.93,62.87 52.58,61.21 52.58,58.8 v2(54.74,56.39) v2(55.63,56.39)
+V5_USB: length 4.1
  TOP w0.508: J1.1 56.87,55.14 56.52,55.5 54.48,55.5 TP4.1
AGND: length 27.2
  TOP w0.381: 78.96,99.79 J6.6 77.78,101.17
  TOP w0.457: v2(76.58,91.69) 76.96,91.69 77.18,91.48 Q2.2
  TOP w0.508: C64.2 v2(86.11,80.21) ; C62.2 82.55,80.47 82.55,80.9 ; v2(83.19,81.28) 83.43,81.04 C63.2 ; C61.1 v2(80.9,80.21) ; R76.2 v2(76.25,88.01) ; 86.74,88.77 87.17,88.34 Q5.2 88.72,88.34 v2(89.28,88.9) ; v2(91.95,97.66) 92.08,97.79 R79.2
  IN1 w0.381: 78.16,101.17 J6.6 ; J6.6 78.96,102.17 ; J6.6 78.96,100.17
  IN2 w0.381: J6.6 78.96,100.17 ; J6.6 78.96,102.17 ; J6.6 78.16,101.17
  BOTTOM w0.381: 78.96,99.79 J6.6 77.78,101.17
  BOTTOM w0.457: Q4.2 83.78,84.44 v2(84.02,84.2) ; Q3.2 83.17,81.3 v2(83.19,81.28)
  BOTTOM w0.508: v2(82.04,78.49) 82.04,77.48 R68.2 80.4,77.23 80.39,77.22 ; v2(76.25,88.01) 76.25,87.2 v1(76.33,87.12) 76.63,86.82 C95.1 ; R78.1 v2(77.34,98.68)
  vias: v2(75.56,99.82) v2(75.56,94.74) v2(76.58,97.41) v2(76.58,81.15) v2(76.96,102.11) v2(77.22,77.34) v2(79.76,89.28) v2(81.15,78.49) v2(81.66,81.03) v2(83.31,89.28) v2(86.61,89.28) v2(89.53,87.12) v2(90.42,80.14) v2(90.68,89.28) v2(90.8,99.19) v2(90.93,95.5) v2(91.82,87.12) v2(91.95,94.62) v2(91.95,80.14) v2(91.95,79.12)
AV12: length 9.2
  TOP w0.61: v2(43.05,77.98) 43.05,76.91 C24.1 ; C23.1 36.37,74.17 v2(35.43,74.17) ; v2(45.59,75.06) 44.53,75.06 C22.1 ; C25.1 v2(39.75,77.98)
  BOTTOM w0.254: U7.43 45.43,74.9 v2(45.59,75.06) ; v2(39.75,77.98) 39.71,77.94 U7.27 ; U7.35 42.91,77.84 v2(43.05,77.98) ; v2(35.56,76.96) 36.02,76.5 U7.19 ; v2(35.43,74.17) 35.5,74.1 U7.13
  vias: v1(36.45,75.06)
DV12: length 3.2
  BOTTOM w0.254: v2(42.67,67.82) 42.91,68.06 U7.61 ; v2(45.59,73.91) 45.38,73.7 U7.46
  BOTTOM w0.508: 29.84,62.99 v1(28.45,62.99)
  vias: v2(29.97,65.53) v2(30.86,65.53) v2(31.75,65.53)
GND: length 492.4
  TOP w0.198: U1.35 v2(55.88,68.02) ; U1.15 v2(62.36,67.62)
  TOP w0.356: J2.3 v2(69.32,94.62) ; J2.18 v2(61.81,97.28) ; v2(67.81,94.62) J2.6 ; J2.21 v2(58.81,97.28) ; J2.26 v2(56.31,97.28) ; J2.9 v2(66.32,97.28) ; J2.15 v2(63.32,97.28) ; J2.12 v2(64.81,97.28)
  TOP w0.381: J3.3 40.84,40.19 40,41.02 39.75,41.02 ; J3.3 40.84,39.31 40.13,38.61 40.13,38.35 40.84,37.65 J3.G3 ; J3.3 39.41,39.92 ; 53.46,51.05 J1.G1 ; J1.G1 52.05,49.64 ; J1.G1 52.05,52.46 ; J1.G1 50.64,51.05 ; 39.59,42.37 J3.2 ; J3.2 40.84,42.11 39.75,41.02 ; J3.2 40.84,42.73 40.39,43.18 39.62,43.18 ; 39.75,41.02 39.62,40.89 ; 25.86,88.95 J4.G2 24.42,90.97 ; 71.16,83.4 H1.1 68.28,80.52 ; J3.G3 40.84,35.11 ; J3.G3 39.51,36.97 ; J4.G1 41.56,91.47 41.91,91.82 41.91,92.96 41.78,93.09 ; J4.G1 42.23,90.97 42.83,91.57 43.05,91.57 ; J4.G1 41.56,90.52 41.89,90.19 42.43,90.19 43.18,90.93 ; J3.G2 49.14,36.97 ; J3.G2 47.69,37.53 48.51,38.35 47.69,39.18 J3.4 ; J3.G2 47.69,35.12 ; 92.11,51.05 J1.G2 ; J1.G2 89.29,51.05 ; J1.G2 90.7,49.64 ; J1.G2 90.7,52.46 ; J3.G1 47.69,42.23 49.02,40.89 ; 41.56,96.3 42.81,96.3 ; 41.56,96.3 41.56,94.36 ; 41.56,96.3 41.56,98.24 ; 46.88,98.97 J2.G2 ; J2.G2 48.52,95.85 ; J2.G2 50.15,98.97 ; J2.G2 48.52,102.08 ; J2.G1 71.48,98.97 ; J2.G1 73.11,95.85 ; J2.G1 73.11,102.08 ; 49.02,39.88 48.98,39.92 J3.4 ; J3.4 47.69,40.07 49.02,41.4
  TOP w0.406: v2(67.81,94.62) 67.81,93.66 U4.8 ; U10.8 v2(32.26,88.65) ; U10.3 v2(32.26,86.11) ; U4.3 v2(67.82,91.95)
  TOP w0.508: J1.10 65.87,55.08 v2(66.29,55.5) ; C29.2 v2(38.99,70.23) ; v2(45.97,72.01) 45.39,72.01 C21.2 ; v2(67.69,71.5) 67.69,71.13 R4.2 68.97,69.85 v2(69.09,69.85) ; J1.4 59.87,52.76 v2(59.82,52.7) ; C83.2 49.92,54.86 v2(50.29,54.86) ; R56.2 73.2,68.71 v2(72.52,68.71) ; C2.1 v2(52.83,67.06) ; J1.7 v2(62.87,52.7) ; C57.2 v2(85.85,65.01) ; R55.2 v2(74.42,76.15) ; C44.2 39.5,85.52 v2(39.5,85.09) ; v2(42.67,85.85) 44.96,85.85 46.48,87.38 U8.6 46.48,89.97 46.56,90.04 C42.2 v2(46.56,91.44) ; C1.1 v2(52.83,65.53) ; C24.2 v2(42.16,75.87) ; C50.2 v2(72.77,77.47) ; v2(63.75,100.54) J2.S1 ; J2.S1 v2(67.18,100.54) ; J2.S1 v2(65.44,99.19) ; R21.2 v2(65.66,69.34) ; v2(90.17,73.79) 90.17,74.55 89.93,74.79 C71.2 ; C8.2 65.41,70.61 v2(65.66,70.87) ; C3.1 v2(52.83,70.74) ; R88.2 v2(49.78,50.42) ; v2(73.91,90.81) 73.15,90.81 72.77,91.19 U5.1 73.06,91.69 v2(73.91,91.69) ; v2(52.83,69.47) 53.52,69.47 R24.2 ; J2.S2 v2(56.19,99.19) ; J2.S2 v2(57.91,100.54) ; J2.S2 v2(54.48,100.54) ; J1.13 v2(68.87,55.41) ; C5.2 v2(55.5,90.81) ; R23.2 61.54,59.61 v2(61.21,59.94) ; v2(39.5,84.2) 41.15,84.2 41.4,84.46 ; v2(80.64,61.34) 80.57,61.26 R65.1 R66.1 ; R73.1 v2(90.17,73.03) ; C20.2 v2(41.96,70.23) ; C25.2 v2(38.99,75.87) ; R38.2 v1(35.43,71.63) v2(35.43,72.9) ; 69.14,63.07 C69.1 69.85,63.88 ; J1.16 v2(71.87,55.36) ; C58.2 v2(83.82,64.52) ; v2(52.96,90.81) 52.96,92.33 52.65,92.63 C93.2 52.2,92.38 v2(52.2,90.81) ; v2(31.05,78.68) C38.1 v2(32.26,79.88) ; R57.2 73.08,67.06 v2(72.52,67.06) ; v2(82.3,63.75) 82.3,63.37 82.73,62.94 R8.2 83.39,62.94 83.82,63.37 v2(83.82,63.75) ; C47.2 v2(72.77,75.77) ; v2(81.79,64.52) 81.66,64.64 C94.1 ; C37.1 34.42,79.63 v2(34.16,79.88) ; v2(37.59,84.2) U9.1 38.52,85.31 v2(38.73,85.09) ; R22.2 v2(65.66,68.33) ; J1.22 77.87,55.22 v2(77.72,55.37) ; C92.2 v2(45.67,46.91) ; C92.2 v2(45.67,45.21) ; C92.2 v2(46.48,46.1) ; v2(70.28,66.93) C70.1 ; C70.1 v2(70.28,65.28) ; C70.1 v2(69.47,66.04) ; C82.2 v2(50.29,53.98) ; C23.2 v2(38.23,74.04) ; C6.2 v2(65.66,71.63) ; v2(35.69,78.05) C26.2 ; v2(80.01,64.52) R67.1 C60.2 ; J1.19 v2(74.87,55.37) ; C51.2 v2(72.77,72.95) ; C36.1 v2(40.26,73.28) ; C9.2 v2(65.66,65.91) ; v2(42.55,74.93) C22.2 ; R25.2 v2(65.66,67.31) ; C7.2 v2(65.48,63.63) ; C72.2 v2(87.5,77.42) ; R72.1 v2(90.17,72.01)
  TOP w0.61: J1.28 v2(83.87,52.83) ; v2(86.74,52.83) 86.87,52.97 J1.S2 ; J1.S1 v2(55.87,52.7) ; v2(72.01,61.21) 72.01,61.59 72.14,61.72 U12.2 ; C74.1 v2(74.68,64.9)
  IN1 w0.381: J4.7 33.71,90.68 ; J4.7 32.9,89.87 ; J4.7 34.52,89.87 ; J4.7 33.71,89.06 ; 48.55,42.37 J3.G1 ; J3.G1 47.69,43.73 ; J3.G1 46.82,42.37 ; J4.G2 25,90.97 ; J4.G2 26.72,90.97 ; J4.G2 25.86,89.41 ; 40.26,41.02 40.84,40.44 J3.3 ; J4.G4 25.86,97.78 ; J4.G4 25.86,94.66 ; J4.G4 25,96.22 ; J3.3 39.92,39.92 ; J3.3 40.84,38.55 ; J2.G2 49.77,98.97 ; J2.G2 48.52,101.7 ; J2.G2 47.26,98.97 ; J2.G2 48.52,96.23 ; 68.28,80.52 H1.1 ; H1.1 71.16,77.64 ; H1.1 71.16,83.4 ; H1.1 74.04,80.52 ; 41.7,42.37 J3.2 ; J3.2 39.97,42.37 ; J3.2 40.84,43.73 ; 31.02,91.37 J4.4 29.4,91.37 ; 42.42,90.97 J4.G1 ; J4.G1 41.56,89.41 ; J4.G1 40.7,90.97 ; J3.4 47.69,40.57 48.13,41.02 ; J3.4 48.68,39.92 ; J3.4 J3.G2 ; 47.69,35.37 J3.G2 ; J3.G2 48.63,36.97 ; 73.11,96.23 J2.G1 ; J2.G1 74.37,98.97 ; J2.G1 73.11,101.7 ; J2.G1 71.86,98.97 ; J3.G3 39.76,36.97 ; J3.G3 40.84,35.62 ; J3.G3 40.84,38.29 ; J4.G3 41.56,97.78 ; J4.G3 42.42,96.22 ; J4.G3 41.56,94.66
  IN2 w0.381: J3.G2 47.69,35.49 ; J3.G2 48.63,36.97 ; J3.G2 47.69,38.29 ; J3.2 39.97,42.37 ; J3.2 41.7,42.37 ; J3.2 40.84,43.73 ; 25.86,94.66 J4.G4 ; J4.G4 25.86,97.78 ; J4.G4 25,96.22 ; 41.56,94.66 J4.G3 ; J4.G3 41.56,97.78 ; J4.G3 42.42,96.22 ; H2.1 26.36,55.5 ; H2.1 26.36,49.74 ; H2.1 29.24,52.62 ; 42.42,90.97 J4.G1 ; J4.G1 40.7,90.97 ; J4.G1 41.56,89.41 ; 74.37,98.97 J2.G1 ; J2.G1 71.86,98.97 ; J2.G1 73.11,101.7 ; J2.G1 73.11,96.23 ; 47.26,98.97 J2.G2 ; J2.G2 48.52,101.7 ; J2.G2 49.77,98.97 ; J2.G2 48.52,96.23 ; J4.G2 25.86,89.41 ; J4.G2 26.72,90.97 ; J4.G2 25,90.97 ; 71.16,83.4 H1.1 ; H1.1 74.04,80.52 ; H1.1 71.16,77.64 ; H1.1 68.28,80.52 ; 40.26,41.02 40.84,40.44 J3.3 ; J3.G3 40.84,35.63 ; J3.G3 39.89,36.97 ; J3.G3 40.84,38.17 ; J3.4 48.6,39.92 ; J3.4 47.69,38.54 ; J3.4 47.69,40.45 48.26,41.02 ; 48.55,42.37 J3.G1 ; J3.G1 46.82,42.37 ; J3.G1 47.69,43.73 ; J4.7 33.71,90.68 ; J4.7 33.71,89.06 ; J4.7 32.9,89.87 ; J4.7 34.52,89.87 ; 40.84,38.41 J3.3 ; J3.3 39.71,39.92 ; 31.02,91.37 J4.4 29.4,91.37
  BOTTOM w0.254: U7.16 35.7,75.3 35.43,75.56 v2(35.31,75.56) ; v2(38.49,77.98) 38.51,77.96 U7.24 ; v2(45.59,76.2) 45.49,76.1 U7.40 ; U7.32 v2(41.71,77.98) ; U7.10 v2(35.43,72.9)
  BOTTOM w0.381: C81.2 88.27,85.85 87.5,85.09 87.5,82.17 89.53,80.14 89.53,78.74 90.93,77.34 ; J3.G2 47.69,37.53 48.51,38.35 47.69,39.18 J3.4 ; J3.G2 49.01,36.97 49.02,36.96 ; J3.G2 47.69,35.05 ; 49.02,39.88 48.98,39.92 J3.4 ; J3.G3 40.84,35.25 ; J3.G3 39.62,36.96 ; J3.G3 40.84,37.65 40.13,38.35 ; J4.7 33.71,88.59 ; 41.56,88.87 J4.G1 ; J4.G1 42.89,90.97 ; J4.G1 41.56,91.34 42.67,92.46 ; 24.77,92.46 25.86,91.36 J4.G2 ; J3.2 40.84,42.98 40.64,43.18 39.12,43.18 ; J3.2 40.84,42.11 39.88,41.15 40.84,40.19 J3.3 ; J3.2 39.59,42.37 ; J4.G2 25.86,89.08 ; J4.G2 24.42,90.97 ; v2(25.91,98.81) 25.91,96.27 J4.G4 ; J3.4 47.69,40.07 49.02,41.4 ; J4.G3 41.56,94.01 v2(41.53,93.98) ; J4.G3 43.13,96.22 ; J4.G3 41.56,98.39 ; H2.1 26.36,55.5 ; H2.1 26.36,49.74 ; H2.1 29.24,52.62 ; J4.G4 25.86,94.19 ; J4.G4 24.34,96.22 ; J3.G1 48.93,42.37 ; J3.G1 47.69,44.11 ; J3.G1 46.44,42.37 ; J3.G1 47.69,42.23 49.02,40.89 ; J2.G2 50.15,98.97 ; J2.G2 46.88,98.97 ; J2.G2 48.52,102.08 ; J2.G2 48.52,95.85 ; H1.1 71.16,83.4 ; H1.1 68.28,80.52 ; H1.1 71.16,77.64 ; J3.3 40.84,39.31 39.88,38.35 ; J3.3 39.41,39.92 ; 73.11,102.08 J2.G1 ; J2.G1 73.11,95.85 ; J2.G1 71.48,98.97 ; J4.4 29.01,91.37 28.83,91.19
  BOTTOM w0.508: C32.2 v2(50.29,60.2) ; R41.2 v2(48.39,69.47) ; C30.2 44.7,65.71 v2(44.7,65.15) ; v2(47.37,65.66) 48.2,66.48 C28.1 ; 73.79,58.42 C79.2 74.73,59.13 74.3,59.56 ; v2(28.57,60.83) 30.08,60.83 EC1.2 ; v2(32.38,60.45) 31.75,60.45 30.96,61.24 EC1.2 ; R99.1 79.93,60.5 80.64,61.21 v2(80.64,61.34) ; v2(43.94,65.15) 43.43,65.66 R37.2 ; EC1.2 29.87,61.85 v2(28.57,61.85) ; v2(38.23,65.66) 38.35,65.66 38.61,65.91 C40.2 R40.2 ; v2(83.87,52.83) 83.87,53.72 C4.2 ; v2(31.24,72.01) 31.32,72.09 C41.2 ; R62.1 74.42,75.13 v2(74.42,76.15) ; C31.2 v2(48.39,68.45) ; C59.2 v2(78.87,71.63) ; 74.48,88.7 76.91,88.7 77.27,88.34 C80.2 ; C39.2 v2(31.24,69.39) ; C27.2 37.71,64.9 v2(38.23,64.9) ; R34.2 34.54,65.66 v2(34.42,65.53) 33.91,65.53 33.67,65.77 C34.2
  BOTTOM w0.533: 69.22,62.36 71.75,62.36 ; v2(72.01,61.21) 71.88,61.09 U13.2 69.09,61.09 ; 71.75,63.63 U13.4 v2(68.83,63.63) ; 69.09,59.82 U13.1 71.75,59.82
  BOTTOM w0.61: v2(42.93,63.37) 42.42,63.88 U6.4 ; v2(28.19,67.18) C33.1 29.54,66.88 29.08,66.42 v2(28.19,66.42)
  vias: v1(39.88,74.04) v2(23.67,47.12) v2(23.67,43.99) v2(23.75,98.81) v2(23.75,92.84) v2(23.75,87.76) v2(23.75,80.14) v2(23.75,77.6) v2(23.75,72.52) v2(23.75,67.44) v2(23.75,62.36) v2(23.75,57.28) v2(23.75,50.42) v2(26.42,48.01) v2(26.42,47.24) v2(26.42,46.48) v2(26.42,45.59) v2(26.42,44.83) v2(26.42,44.07) v2(26.8,37.47) v2(26.92,33.91) v2(27.18,49.02) v2(27.18,48.01) v2(27.18,47.24) v2(27.18,46.48) v2(27.18,45.59) v2(27.18,44.83) v2(27.18,44.07) v2(27.3,78.11) v2(27.97,85.09) v2(27.94,75.44) v2(28.07,38.99) v2(28.32,41.66) v2(28.83,56.9) v2(29.72,79.88) v2(29.84,83.06) v2(29.97,75.44) v2(30.48,33.91) v2(32.02,36.68) v2(35.56,33.91) v2(37.08,78.99) v2(37.85,75.69) v2(37.85,73.15) v2(37.97,82.42) v2(38.23,41.53) v2(38.23,40.64) v2(38.61,36.58) v2(38.73,83.31) v2(39.12,74.68) v2(39.12,73.15) v2(39.12,41.53) v2(39.12,40.64) v2(40.39,70.23) v2(40.64,33.91) v2(40.89,75.69) v2(40.89,74.68) v2(40.89,55.5) v2(41.27,51.44) v2(41.4,54.61) v2(41.4,53.47) v2(41.4,52.32) v2(41.53,102.11) v2(41.53,99.69) v2(41.91,55.5) v2(42.04,51.44) v2(42.67,50.67) v2(42.8,55.5) v2(42.8,54.61) v2(42.8,53.47) v2(42.8,52.32) v2(42.8,51.44) v2(43.05,49.91) v2(43.43,50.67) v2(43.81,102.11) v2(43.94,49.91) v2(44.2,50.67) v2(44.7,98.17) v2(44.83,93.85) v2(46.99,48.77) v2(47.5,47.24) v2(47.5,45.21) v2(48.01,73.53) v2(48.13,33.91) v2(48.77,46.23) v2(48.89,73.28) v2(48.89,72.39) v2(49.02,95.89) v2(50.04,71.5) v2(50.67,102.11) v2(50.67,98.04) v2(50.93,86.74) v2(50.93,43.94) v2(51.82,69.72) v2(52.2,86.74) v2(52.96,98.04) v2(52.96,97.28) v2(53.59,86.74) v2(53.72,98.04) v2(53.72,97.28) v2(53.97,102.11) v2(54.23,43.94) v2(54.48,98.04) v2(54.48,97.28) v2(55.5,62.99) v2(55.5,61.47) v2(55.63,71.75) v2(55.63,59.94) v2(57.15,52.7) v2(57.28,84.2) v2(57.28,83.31) v2(57.53,73.79) v2(57.78,69.22) v2(57.78,67.69) v2(57.78,66.42) v2(57.78,43.94) v2(58.04,94.11) v2(58.17,84.2) v2(58.17,83.31) v2(58.67,50.93) v2(58.67,49.66) v2(59.05,102.11) v2(59.18,73.79) v2(59.25,69.22) v2(59.25,67.69) v2(59.25,66.42) v2(59.44,62.87) v2(59.44,61.47) v2(59.44,59.94) v2(59.69,48.77) v2(60.07,77.72) v2(60.2,94.11) v2(60.58,83.95) v2(60.58,81.92) v2(60.58,80.26) v2(60.64,69.22) v2(60.64,67.69) v2(60.64,66.42) v2(61.21,43.94) v2(61.47,82.42) v2(61.85,94.11) v2(62.79,71.93) v2(63.37,62.87) v2(63.37,61.47) v2(64.13,102.11) v2(64.13,94.11) v2(64.26,48.77) v2(64.26,43.94) v2(65.41,59.18) v2(65.53,94.11) v2(66.67,86.36) v2(66.8,50.42) v2(67.06,43.94) v2(68.33,83.95) v2(68.33,78.36) v2(68.45,59.44) v2(68.58,75.31) v2(68.58,73.79) v2(68.83,64.9) v2(68.83,62.1) v2(68.96,48.77) v2(69.22,102.11) v2(70.1,50.29) v2(70.36,86.74) v2(70.48,99.19) v2(70.61,51.56) v2(70.87,70.74) v2(70.99,84.07) v2(71.25,88.44) v2(71.25,87.5) v2(71.5,86.36) v2(72.77,61.21) v2(73.53,51.69) v2(73.66,82.93) v2(73.79,86.36) v2(73.91,64.9) v2(74.04,89.66) v2(74.3,102.11) v2(74.3,96.01) v2(74.3,93.09) v2(75.06,48.77) v2(75.51,64.52) v2(76.07,51.69) v2(76.07,43.94) v2(76.28,64.52) v2(76.58,52.7) v2(78.61,75.82) v2(79.12,52.7) v2(79.12,43.94) v2(79.38,48.77) v2(79.63,74.42) v2(79.63,73.15) v2(80.26,56.64) v2(80.26,55.88) v2(80.64,75.82) v2(81.15,56.64) v2(81.15,55.88) v2(81.28,74.42) v2(81.28,72.9) v2(81.28,71.25) v2(82.17,43.94) v2(82.3,69.6) v2(82.42,48.77) v2(83.06,74.42) v2(83.06,72.9) v2(83.06,71.25) v2(84.71,74.42) v2(84.71,72.52) v2(84.71,71.12) v2(84.71,51.05) v2(85.22,43.94) v2(88.27,43.94) v2(91.95,77.98) v2(91.95,72.9) v2(91.95,67.82) v2(91.95,62.74) v2(91.95,55.63) v2(91.95,52.58) v2(91.95,47.5)
V33: length 36.3
  TOP w0.61: v2(40,64.14) 40,65.42 38.99,66.43 v2(38.99,67.69) C29.1 v1(39.95,68.5) 40.59,68.5 41.34,67.75 41.34,66.23 41.91,65.66 43.18,65.66 44.32,66.8 v2(45.21,66.8) 47.73,66.8 49.78,64.74 v2(49.78,64.01)
  BOTTOM w0.254: U7.58 44.11,68.15 43.91,67.94 43.71,68.14 U7.59 ; 45.47,68.71 45.16,69.01 45.16,69.03 44.89,69.3 U7.57 ; U7.71 38.91,68.14 38.99,68.06 v2(38.99,67.69)
  BOTTOM w0.508: 45.47,68.71 45.72,68.45 C31.1
  BOTTOM w0.61: 43.91,67.94 43.91,67.6 44.45,67.06 C30.1 44.53,66.8 v2(45.21,66.8) 46.16,66.8 C28.2 46.66,67.3 C31.1 ; v2(40,64.14) 40,63.45 R30.1 ; U6.8 48.31,60.07 C32.1 48.44,60.5 49.35,61.42 R29.2 49.78,62.15 v2(49.78,64.01)
VBUS-IN: length 3
  BOTTOM w0.254: 45.7,69.47 45.47,69.7 U7.56
  BOTTOM w0.508: R36.2 R41.1 v1(45.85,69.47) 45.7,69.47
VIN: length 1.3
  TOP w0.508: 44.58,47.62 45.29,47.62 R89.1
  vias: v1(34.29,39.12) v2(30.23,41.78) v2(30.23,41.02) v2(30.23,40.26) v2(30.99,41.78) v2(30.99,41.02) v2(30.99,40.26) v2(31.75,41.78) v2(31.75,41.02) v2(31.75,40.26) v2(42.29,47.5) v2(42.42,44.96) v2(43.18,47.5) v2(43.18,44.96) v2(44.07,46.99) v2(44.07,45.21) v2(44.83,46.99) v2(44.83,45.21) v2(48.64,93.47) v2(49.4,93.47) v2(50.16,93.47) v2(50.93,93.47) v2(51.69,93.47)
+1.8_VDD: length 32.4
  TOP w0.203: U11.13 82.99,67.13 83.19,66.93 ; U11.68 76.58,72.24 76.47,72.14 76.07,72.14 v2(75.95,72.01) ; U11.4 79.39,66.64 C60.1
  TOP w0.508: 83.19,66.93 83.82,66.29 C58.1 84.65,66.24 C57.1 v2(85.85,66.56) ; v2(78.23,66.24) C60.1
  TOP w0.711: C70.2 71.19,66.03 U12.5
  TOP w0.762: v2(73.15,66.04) v2(72.14,66.04) C70.2
  BOTTOM w0.61: v2(85.85,66.56) 85.53,66.24 v2(78.23,66.24) 78.23,67.31 77.01,68.53 v1(77.01,70.54) C59.1 76.33,71.63 v2(75.95,72.01)
  BOTTOM w0.762: v2(72.14,66.04) v2(73.15,66.04) 75.64,68.53 77.01,68.53
APP: length 9.9
  TOP w0.127: v2(84.96,85.98) 86.65,85.98 87.07,85.56 Q6.G
  BOTTOM w0.127: v2(84.96,85.98) 84.1,85.98 Q4.1 83.78,85.63 83.95,85.47 84.32,85.47 84.58,85.21 v1(84.58,85.09) 84.58,83.82 84.17,83.4 Q3.3 83.11,82.95 82.9,82.95 R104.1
APP#: length 7.4
  TOP w0.127: v2(84.96,86.74) 85.29,86.41 Q5.1
  BOTTOM w0.127: v2(84.96,86.74) 84.2,86.74 v1(84.07,86.61) 83.57,86.11 83.17,86.11 82.59,85.52 Q4.3 81.94,85.27 R105.1
CFG: length 4.9
  TOP w0.127: U1.23 60.18,71.1 61.09,72.01 61.09,73.36 R13.2 61.34,73.71 v1(61.34,74.55)
DCIN_EN: length 5.3
  TOP w0.127: R14.2 65.92,66.47 64.08,66.47 63.75,66.79 62,66.79 61.98,66.82 U1.13
DDCBUF: length 5.7
  TOP w0.127: U1.14 61.94,67.22 62.1,67.06 63.21,67.06 63.46,67.31 R25.1 63.93,67.01 64.13,66.8 65.96,66.8 R18.2
EQ: length 5.7
  TOP w0.127: U1.17 63.01,68.42 R21.1 64.44,68.83 65.96,68.83 R12.2
